# Altium PCB DUTBoard_NO_CAPS_2.PcbDoc (part 1 of 5)
Units mil, origin at the board's own origin, x right, y up, seen from the top; angles counter-clockwise.
Board outline 5475 x 5475 mil, 4 copper layers (Top Layer, Mid-Layer 1, Mid-Layer 2, Bottom Layer); 57 components, 471 nets, 1641 pads, 1025 vias.
Unrouted connection lines stored in the file: 1.
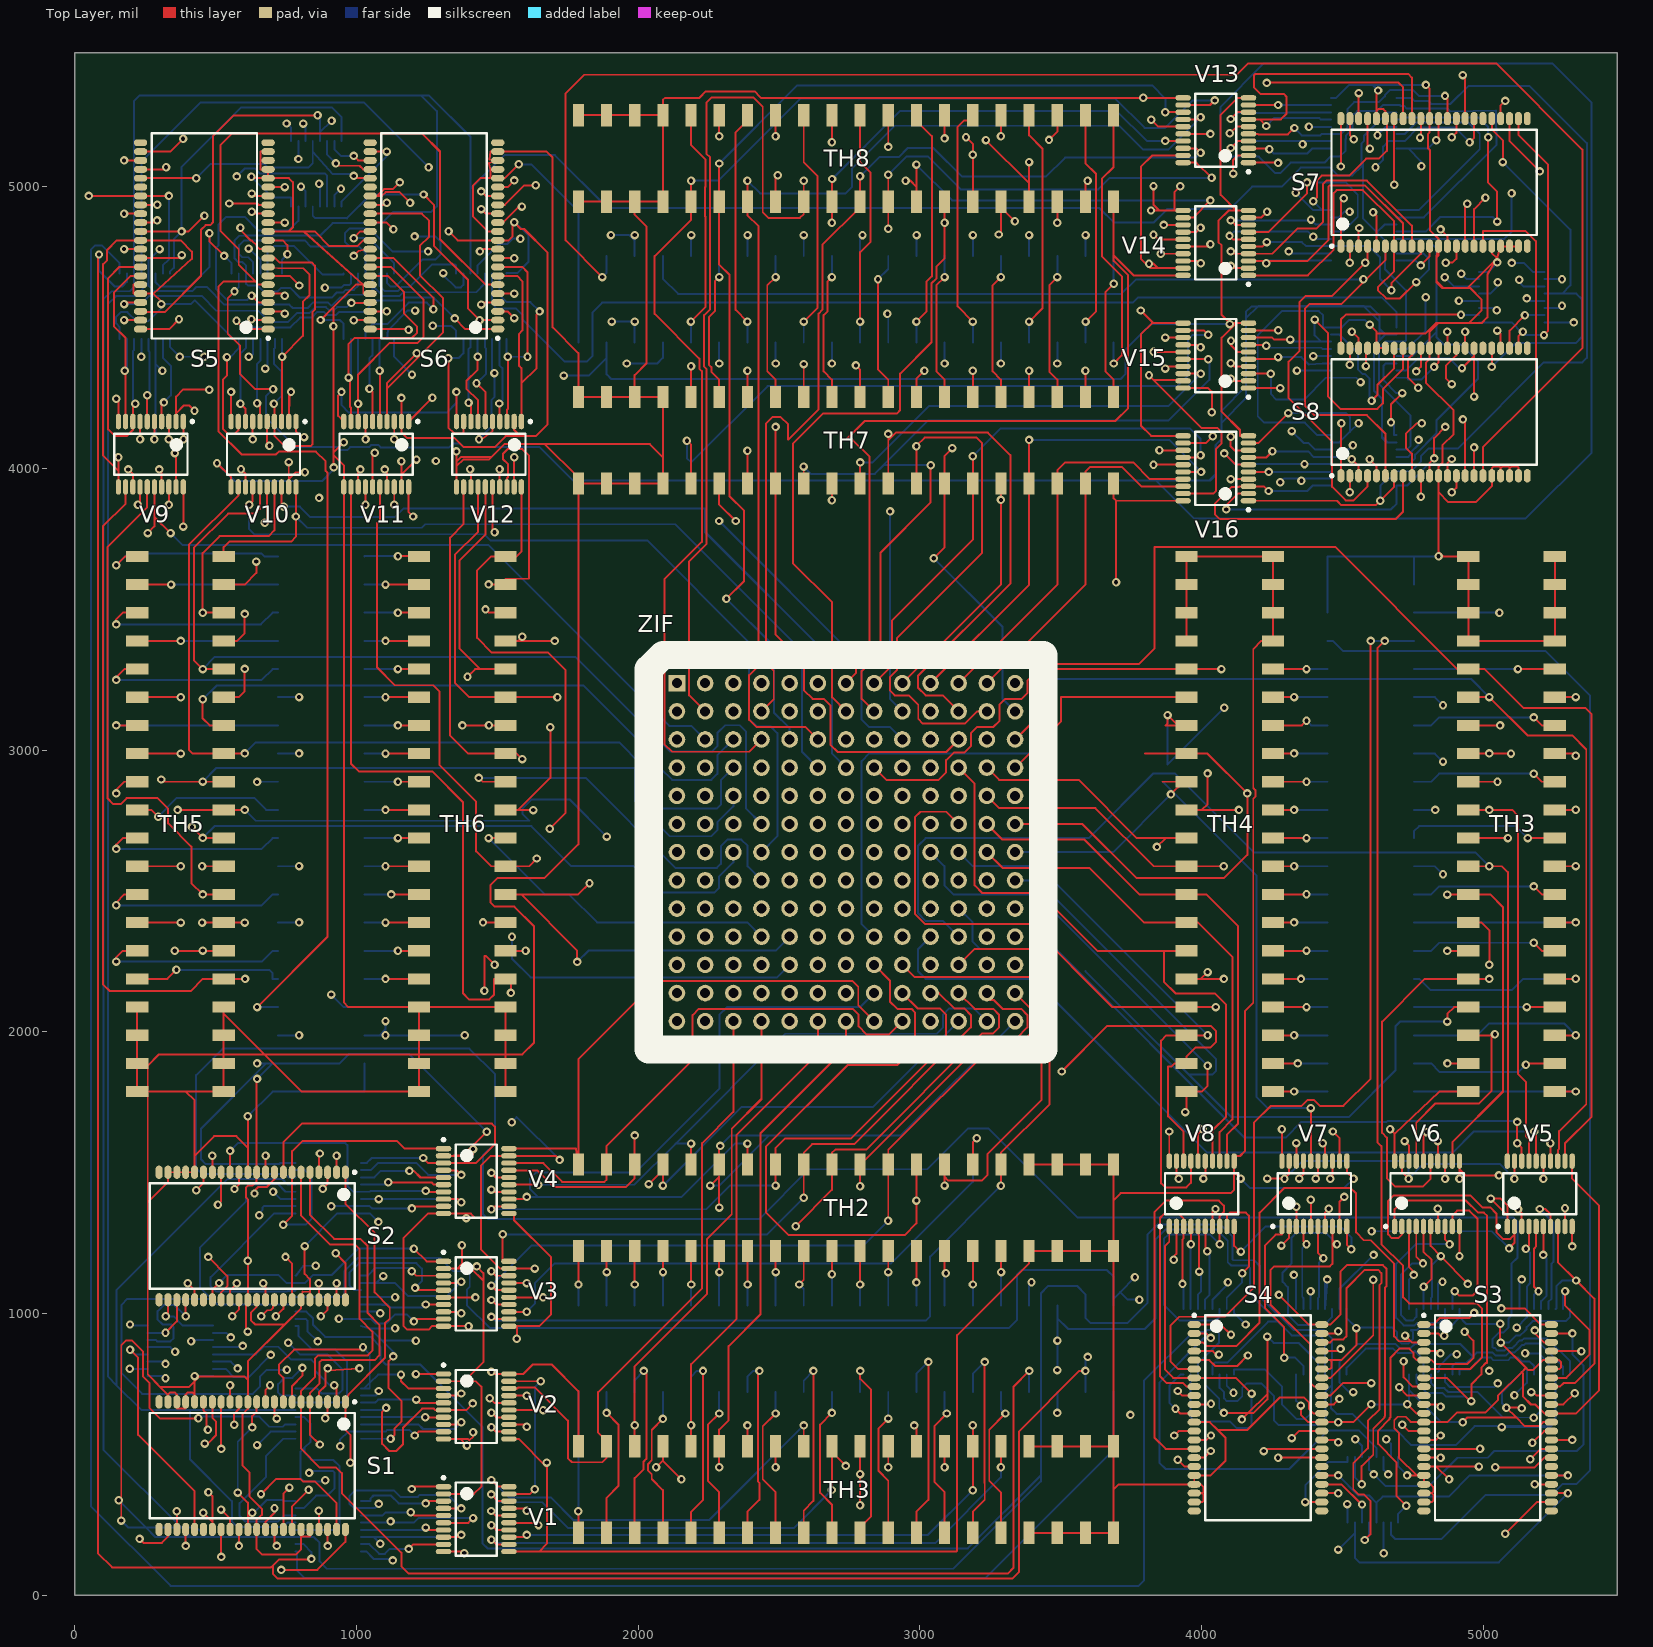
[diagram p0: Top Layer view]
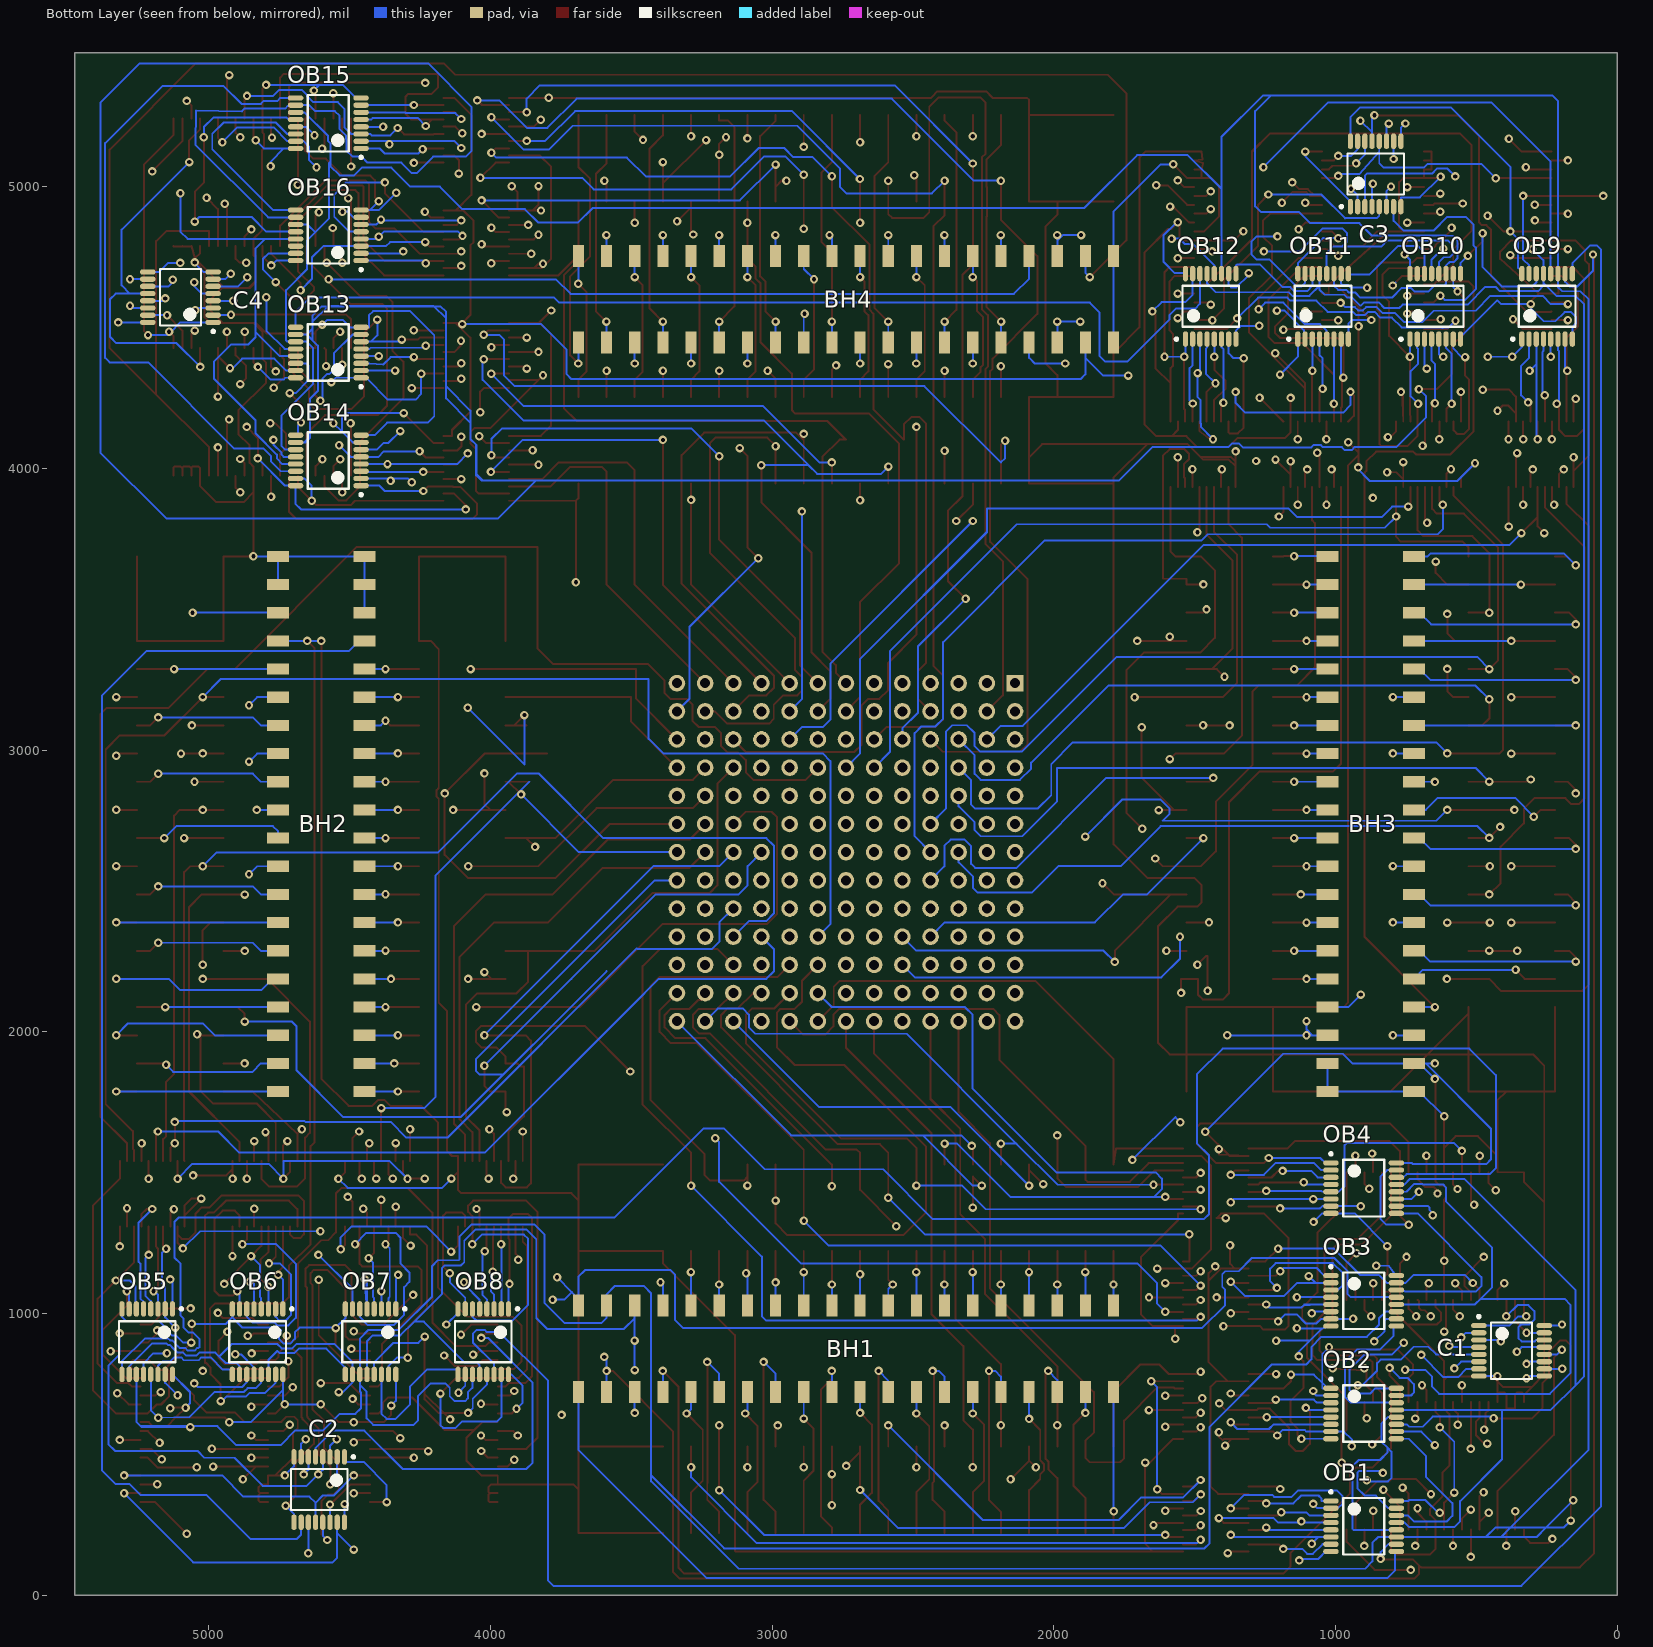
[diagram p1: Bottom Layer view, seen from below]
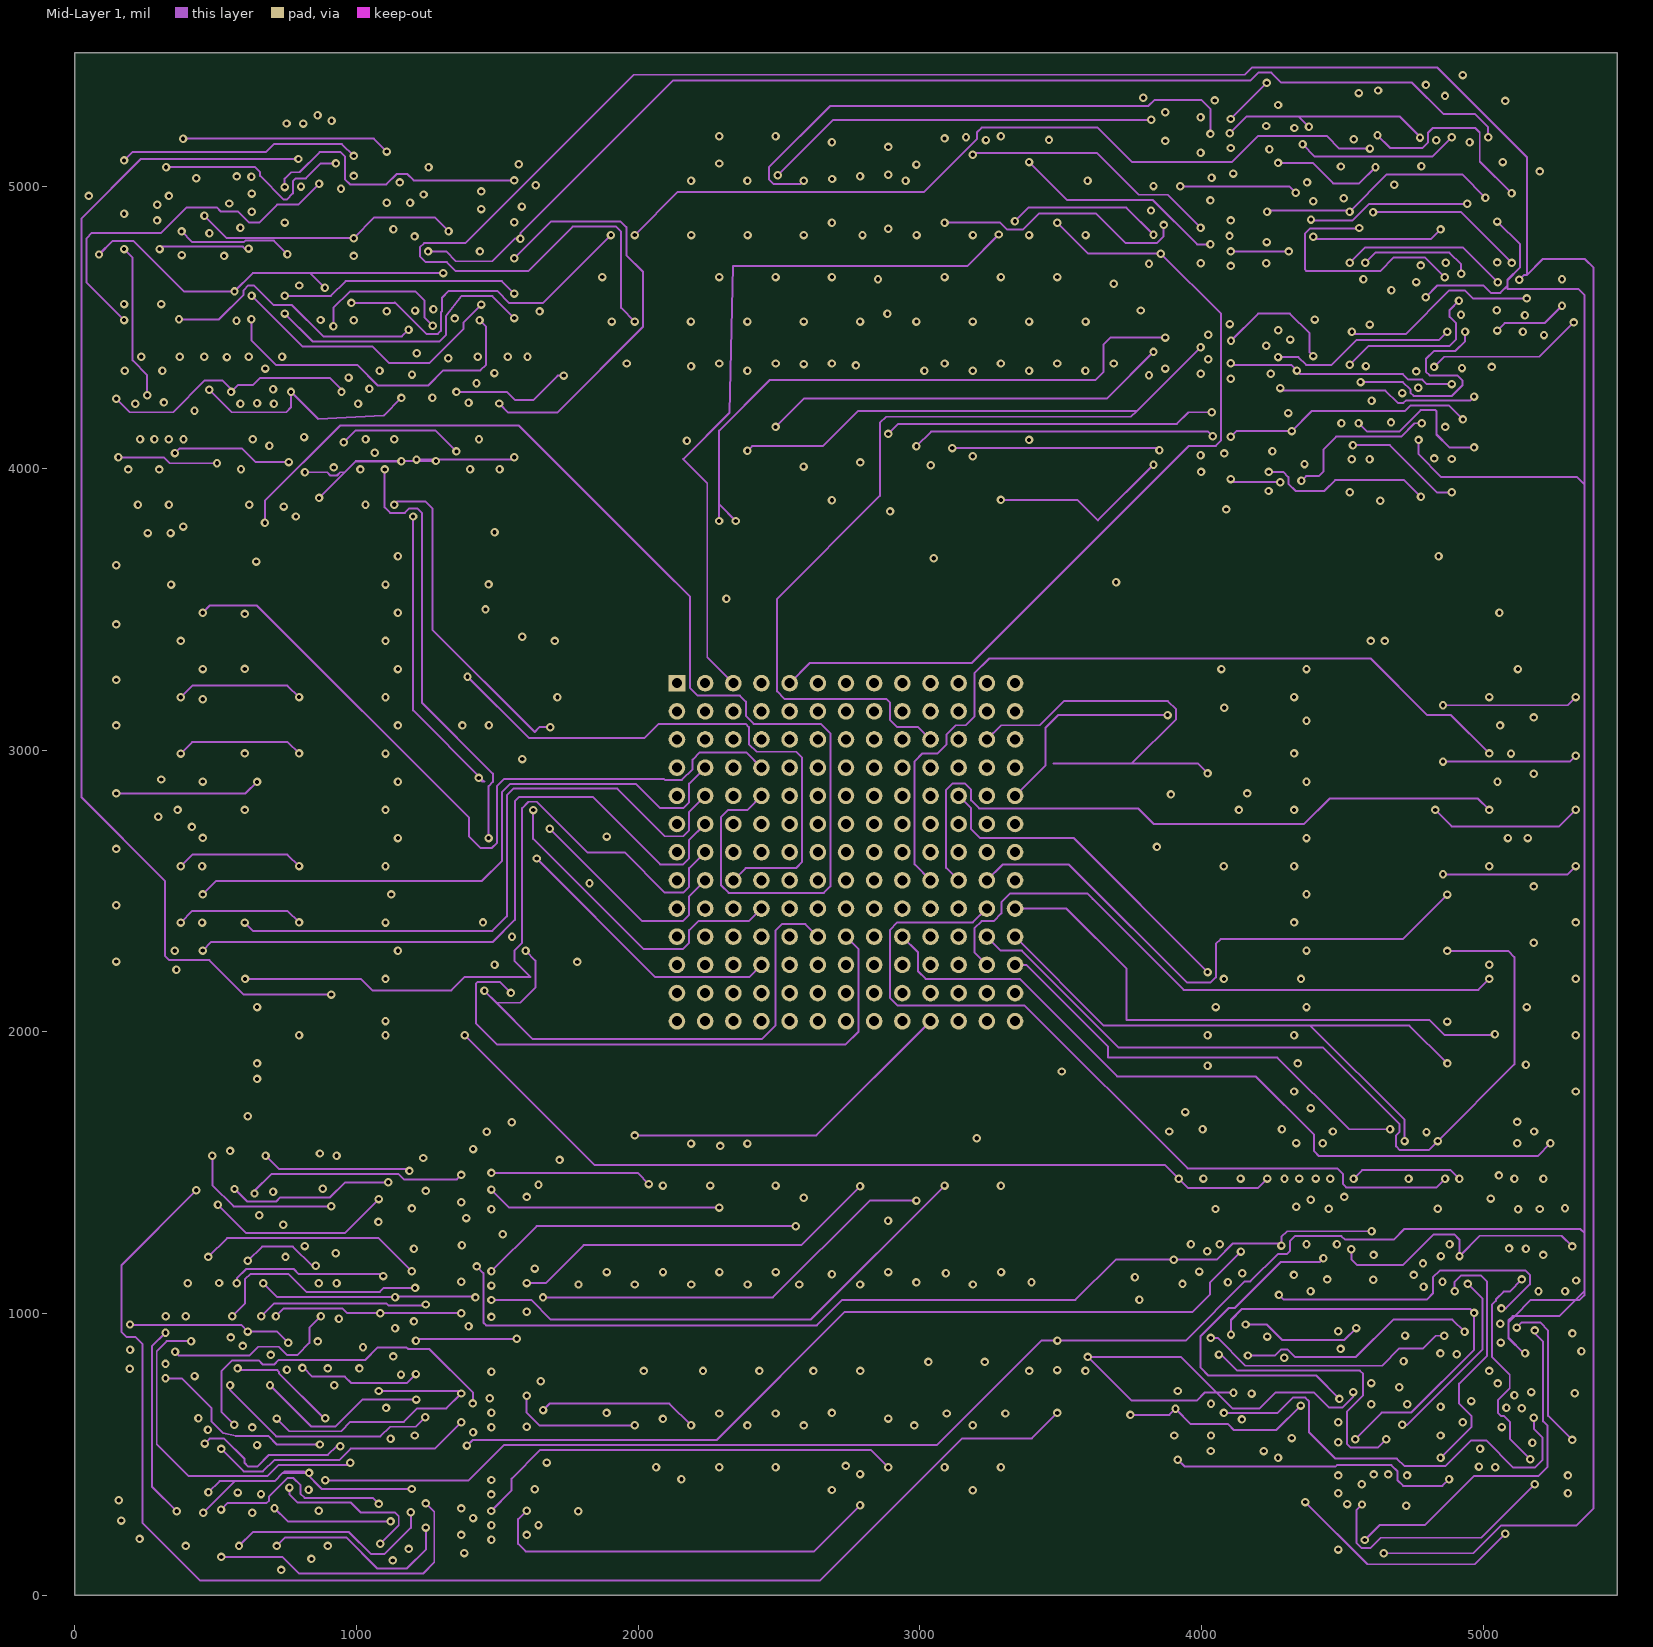
[diagram p2: Mid-Layer 1]
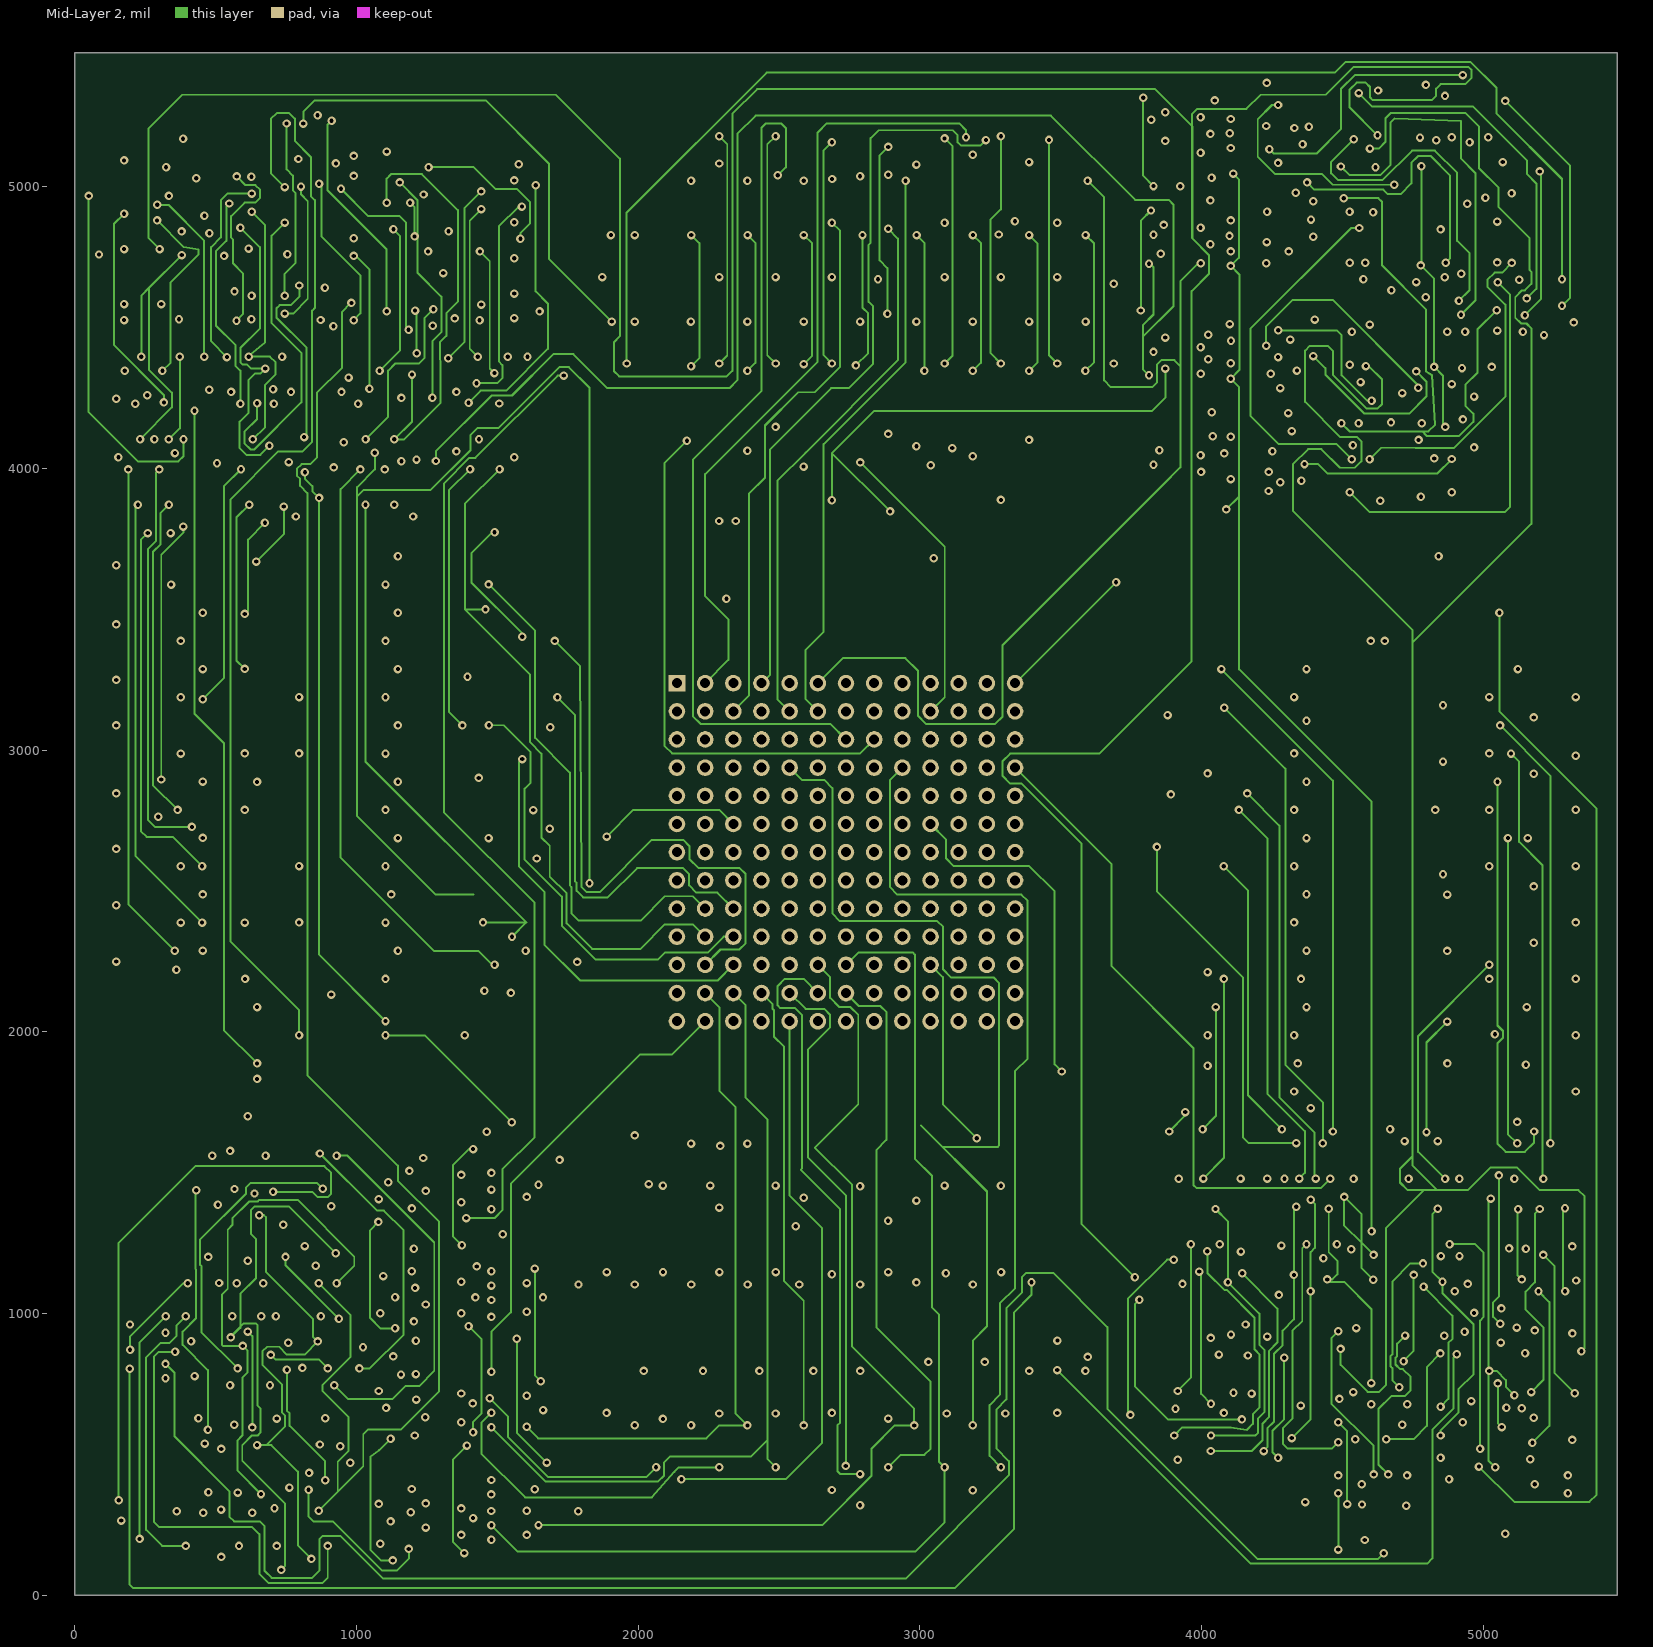
[diagram p3: Mid-Layer 2]
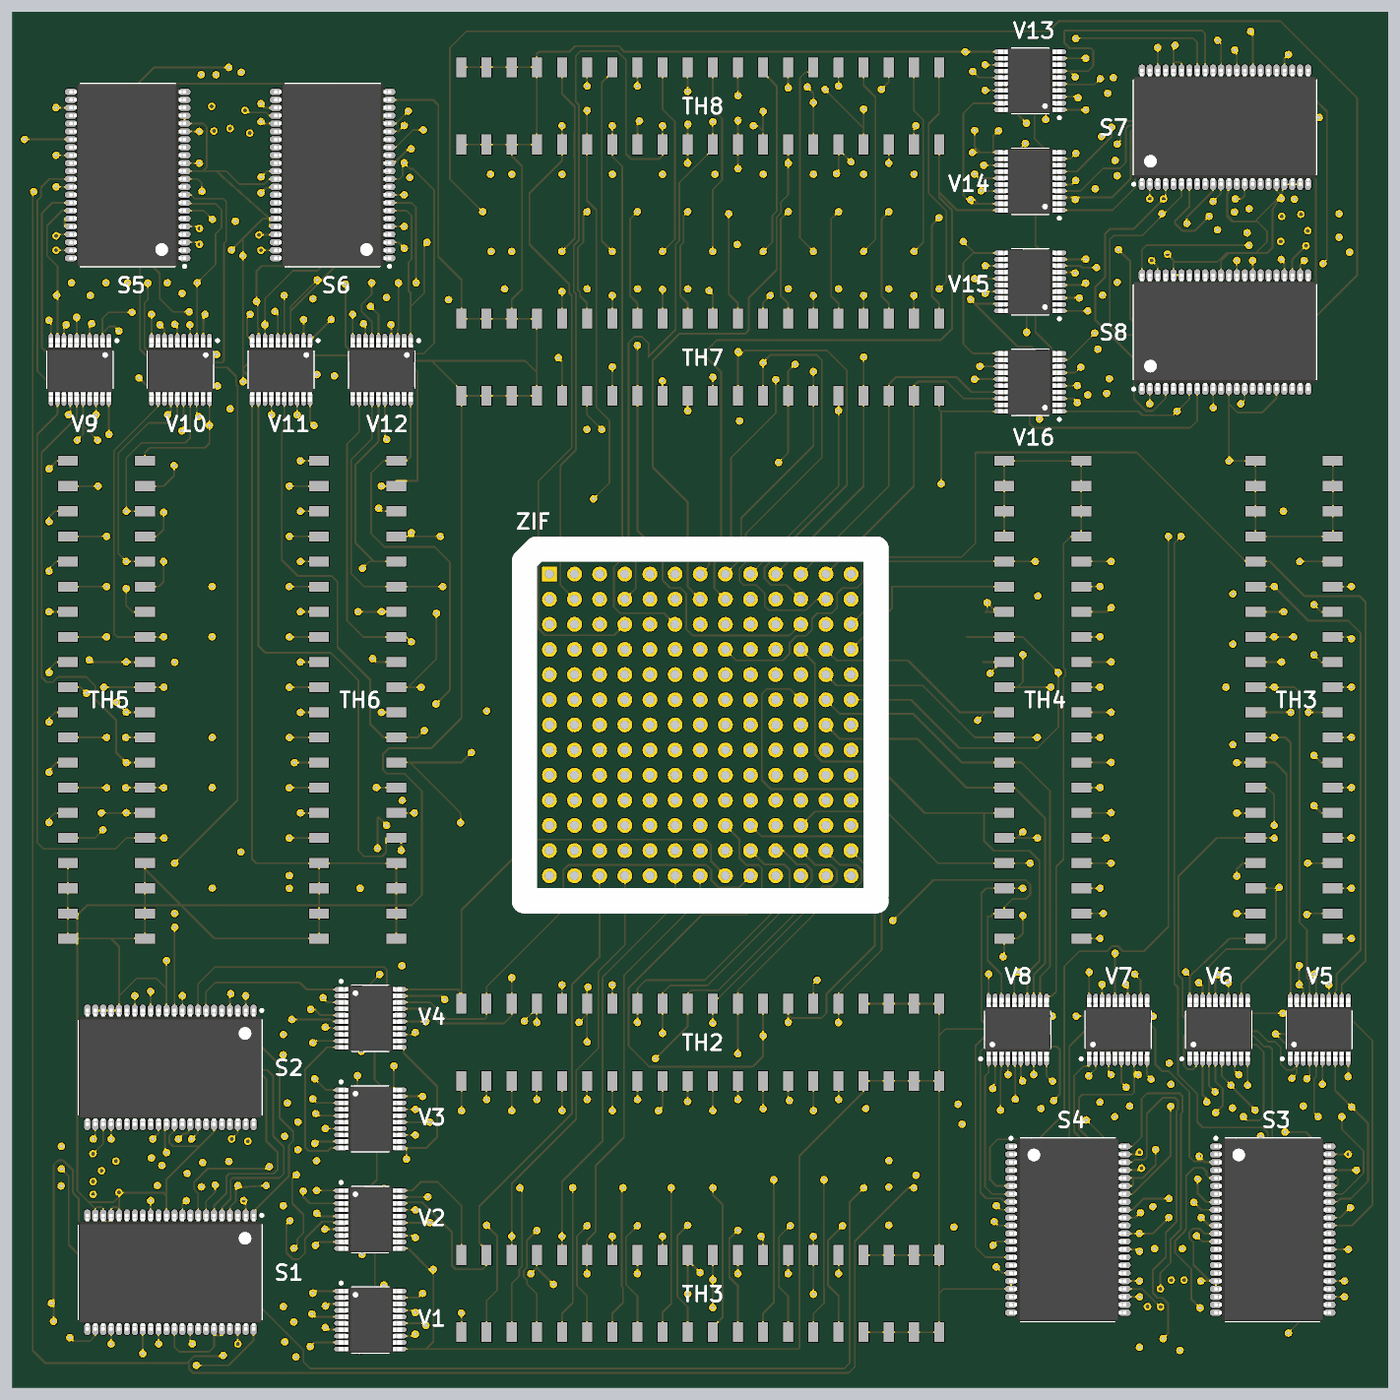
[diagram p8: 3D render of the assembled board from above, using the file's embedded part models]
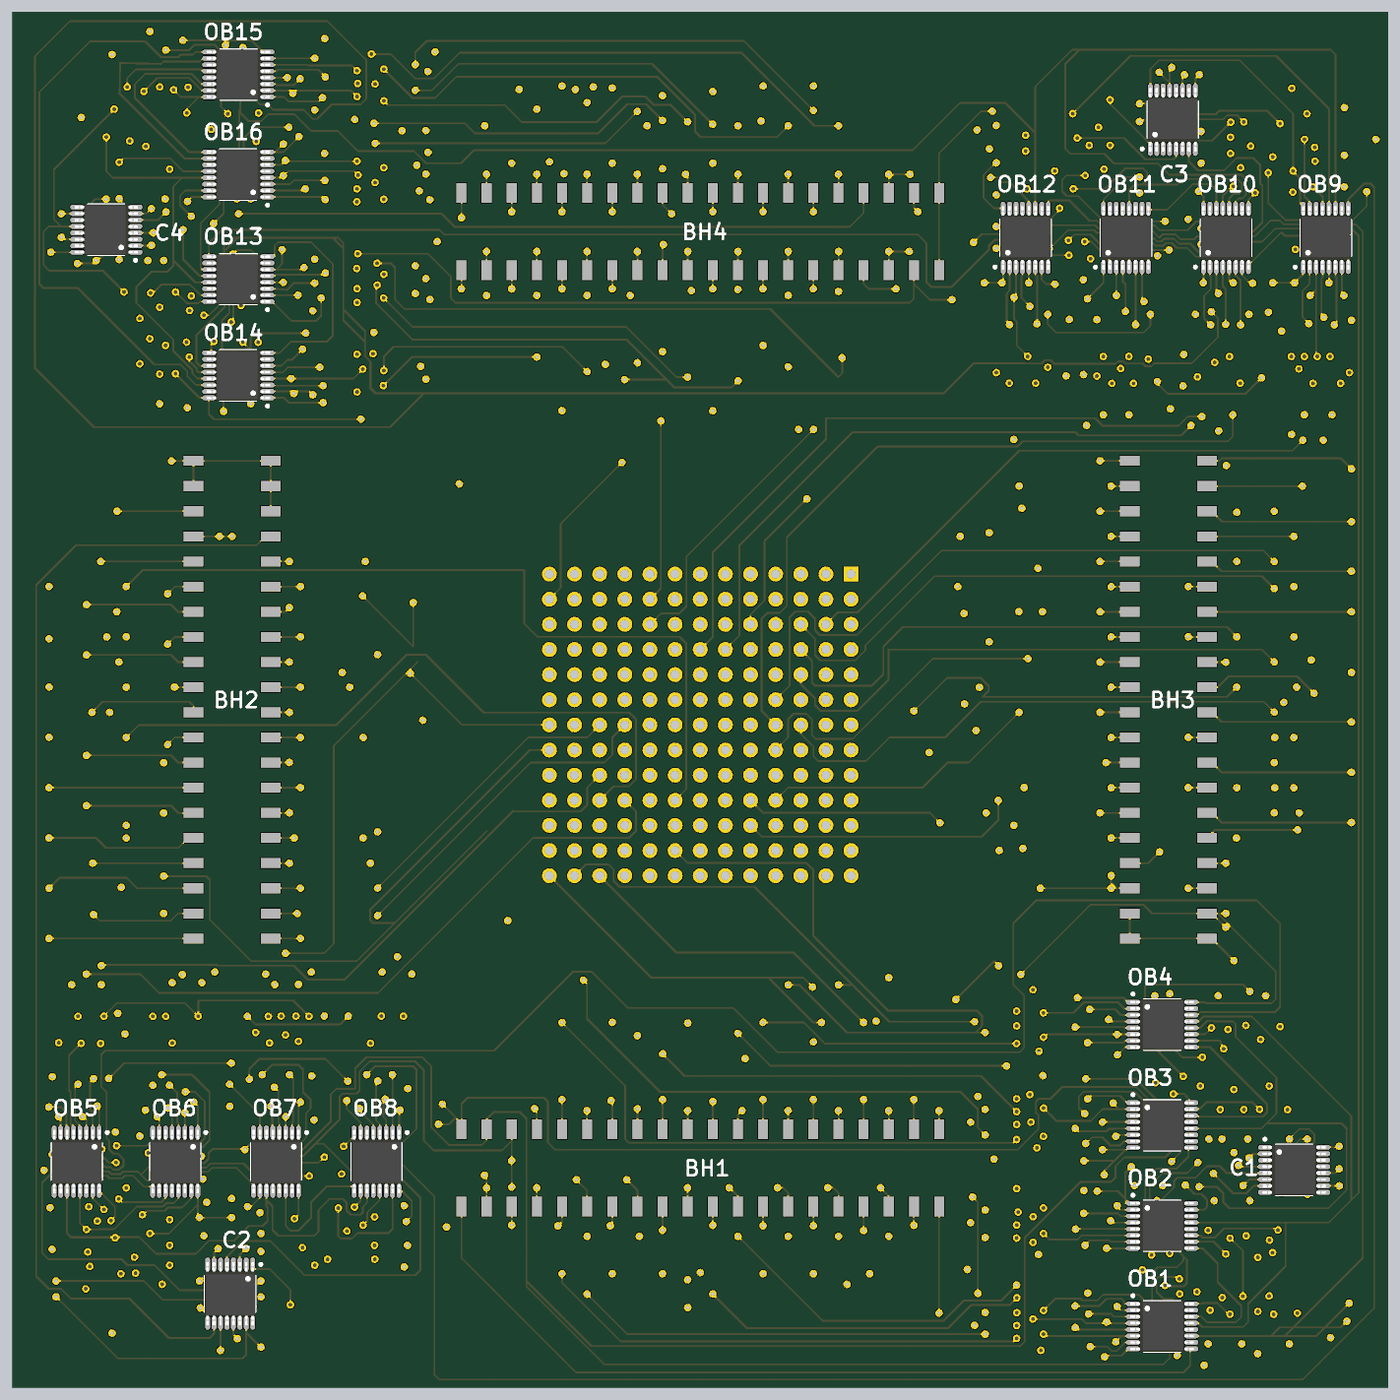
[diagram p9: 3D render of the assembled board from below, using the file's embedded part models]

## Layer stack, top to bottom
Top Solder: solder mask 0.4, Solder Resist, Dk 3.5
Top Layer: signal copper 1.4
Dielectric 1: dielectric 12.6, FR-4, Dk 4.8
Mid-Layer 1: signal copper 1.4
Dielectric2: dielectric 12.6, FR-4, Dk 4.8
Mid-Layer 2: signal copper 1.4
Dielectric3: dielectric 12.6, FR-4, Dk 4.8
Bottom Layer: signal copper 1.4
Bottom Solder: solder mask 0.4, Solder Resist, Dk 3.5

## Board outline
0,0 5475,0 5475,5475 0,5475

## Design rules (kind name [scope] priority, off if disabled: settings)
BoardOutlineClearance [All] p1: gap=20
Clearance [All] p1: gap=10 except(6: SMDPad-SMDPad)
HoleSize [All] p1: absolutevalues=TRUE maxlimit=50 minlimit=15 maxpercent=80.000 minpercent=20.000
MinimumAnnularRing [All] p1: minimumring=7
MinimumSolderMaskSliver [All] p1: minsoldermaskwidth=6
PolygonConnect [All] p1: connectstyle=Relief reliefconductorwidth=10 reliefentries=4 polygonreliefangle="90 Angle" airgapwidth=10
RoutingCorners [All] p1: cornerstyle=45-Degree minsetback=50 maxsetback=50
RoutingVias [All] p1: holewidth=15 width=30 viastyle="Through Hole" minholewidth=15 minwidth=30 maxholewidth=15 maxwidth=30
SolderMaskExpansion [All] p1: expansion=4
Width [All] p1: maxlimit=7 minlimit=7 preferedwidth=7
27 further rules are at their usual default settings.

## Classes and differential pairs
channel class TOP_HEADER_WRP: U_TOP_HEADER_WRP1 U_TOP_HEADER_WRP2 U_TOP_HEADER_WRP3 U_TOP_HEADER_WRP4 U_TOP_HEADER_WRP5 U_TOP_HEADER_WRP6 U_TOP_HEADER_WRP7 U_TOP_HEADER_WRP8
channel class COMBINED_HEADER_WRP: U_COMBINED_HEADER_WRP1 U_COMBINED_HEADER_WRP2 U_COMBINED_HEADER_WRP3 U_COMBINED_HEADER_WRP4
channel class BOTTOM_HEADER_WRP: U_BOTTOM_HEADER_WRP1 U_BOTTOM_HEADER_WRP2 U_BOTTOM_HEADER_WRP3 U_BOTTOM_HEADER_WRP4
net class INSIDE_B[111..0]: INSIDE_B0 INSIDE_B1 INSIDE_B2 INSIDE_B3 INSIDE_B4 INSIDE_B5 INSIDE_B6 INSIDE_B7 INSIDE_B8 INSIDE_B9 INSIDE_B10 INSIDE_B11 INSIDE_B12 INSIDE_B13 INSIDE_B14 INSIDE_B15 INSIDE_B16 INSIDE_B17 INSIDE_B18 INSIDE_B19 INSIDE_B20 INSIDE_B21 INSIDE_B22 INSIDE_B23 INSIDE_B24 INSIDE_B25 INSIDE_B26 INSIDE_B27 INSIDE_B28 INSIDE_B29 INSIDE_B30 INSIDE_B31 INSIDE_B32 INSIDE_B33 INSIDE_B34 INSIDE_B35 INSIDE_B36 INSIDE_B37 INSIDE_B38 INSIDE_B39 INSIDE_B40 INSIDE_B41 INSIDE_B42 INSIDE_B43 INSIDE_B44 INSIDE_B45 INSIDE_B46 INSIDE_B47 INSIDE_B48 INSIDE_B49 INSIDE_B50 INSIDE_B51 INSIDE_B52 INSIDE_B53 INSIDE_B54 INSIDE_B55 INSIDE_B56 INSIDE_B57 INSIDE_B58 INSIDE_B59 INSIDE_B60 INSIDE_B61 INSIDE_B62 INSIDE_B63 INSIDE_B64 INSIDE_B65 INSIDE_B66 INSIDE_B67 INSIDE_B68 INSIDE_B69 INSIDE_B70 INSIDE_B71 INSIDE_B72 INSIDE_B73 INSIDE_B74 INSIDE_B75 INSIDE_B76 INSIDE_B77 INSIDE_B78 INSIDE_B79 INSIDE_B80 INSIDE_B81 INSIDE_B82 INSIDE_B83 INSIDE_B84 INSIDE_B85 INSIDE_B86 INSIDE_B87 INSIDE_B88 INSIDE_B89 INSIDE_B90 INSIDE_B91 INSIDE_B92 INSIDE_B93 INSIDE_B94 INSIDE_B95 INSIDE_B96 INSIDE_B97 INSIDE_B98 INSIDE_B99 INSIDE_B100 INSIDE_B101 INSIDE_B102 INSIDE_B103 INSIDE_B104 INSIDE_B105 INSIDE_B106 INSIDE_B107 INSIDE_B108 INSIDE_B109 INSIDE_B110 INSIDE_B111 INSIDE_B112 INSIDE_B113 INSIDE_B114 INSIDE_B115 INSIDE_B116 INSIDE_B117 INSIDE_B118 INSIDE_B119 INSIDE_B120 INSIDE_B121 INSIDE_B122 INSIDE_B123 INSIDE_B124 INSIDE_B125 INSIDE_B126 INSIDE_B127
component class U_TOP_HEADER_WRP8: TH8
component class U_TOP_HEADER_WRP7: TH7
component class U_TOP_HEADER_WRP6: TH6
component class U_TOP_HEADER_WRP5: TH5
component class U_TOP_HEADER_WRP4: TH4
component class U_TOP_HEADER_WRP2: TH2
component class U_TOP_HEADER_WRP1: TH3
component class U_BOTTOM_HEADER_WRP4: BH4
component class U_BOTTOM_HEADER_WRP3: BH3
component class U_BOTTOM_HEADER_WRP2: BH2
component class U_BOTTOM_HEADER_WRP1: BH1
channel class VT_WRP: U_VT_WRP1 U_VT_WRP2 U_VT_WRP3 U_VT_WRP4 U_VT_WRP5 U_VT_WRP6 U_VT_WRP7 U_VT_WRP8 U_VT_WRP9 U_VT_WRP10 U_VT_WRP11 U_VT_WRP12 U_VT_WRP13 U_VT_WRP14 U_VT_WRP15 U_VT_WRP16
channel class SRAM_WRP: U_SRAM_WRP1 U_SRAM_WRP2 U_SRAM_WRP3 U_SRAM_WRP4 U_SRAM_WRP5 U_SRAM_WRP6 U_SRAM_WRP7 U_SRAM_WRP8
channel class OB_WRP: U_OB_WRP1 U_OB_WRP2 U_OB_WRP3 U_OB_WRP4 U_OB_WRP5 U_OB_WRP6 U_OB_WRP7 U_OB_WRP8 U_OB_WRP9 U_OB_WRP10 U_OB_WRP11 U_OB_WRP12 U_OB_WRP13 U_OB_WRP14 U_OB_WRP15 U_OB_WRP16
channel class COUNTER_WRP: U_COUNTER_WRP1 U_COUNTER_WRP2 U_COUNTER_WRP3 U_COUNTER_WRP4
component class U_VT_WRP16: V14
component class U_VT_WRP15: V13
component class U_VT_WRP12: V12
component class U_VT_WRP11: V11
component class U_VT_WRP10: V10
component class U_VT_WRP9: V9
component class U_VT_WRP8: V8
component class U_VT_WRP7: V7
component class U_VT_WRP6: V6
component class U_VT_WRP5: V5
component class U_VT_WRP4: V4
component class U_VT_WRP3: V3
component class U_VT_WRP2: V2
component class U_VT_WRP1: V1
component class U_SRAM_WRP8: S7
component class U_SRAM_WRP7: S8
component class U_SRAM_WRP6: S6
component class U_SRAM_WRP5: S5
component class U_SRAM_WRP4: S4
component class U_SRAM_WRP3: S3
component class U_SRAM_WRP2: S2
component class U_OB_WRP16: OB16
component class U_OB_WRP15: OB15
component class U_OB_WRP14: OB14
component class U_OB_WRP13: OB13
component class U_OB_WRP12: OB12
component class U_OB_WRP11: OB11
component class U_OB_WRP10: OB10
component class U_OB_WRP9: OB9
component class U_OB_WRP8: OB8
component class U_OB_WRP7: OB7
component class U_OB_WRP5: OB5
component class U_OB_WRP4: OB4
component class U_OB_WRP3: OB3
component class U_OB_WRP2: OB2
component class U_COUNTER_WRP4: C4
component class U_COUNTER_WRP3: C3
component class U_COUNTER_WRP2: C2
component class U_COUNTER_WRP1: C1

## Components (designator, comment, footprint, x,y, rotation, side; value= is the part's Value field where it differs from the comment)
BH1 "ADAFRUIT_HEADER" FEMALE_HEADER_SMD 2737.5,875 r0 bottom (schematic designator ETH1)
BH2 "ADAFRUIT_HEADER" FEMALE_HEADER_SMD 4600,2737.5 r90 bottom (schematic designator ETH1)
BH3 "ADAFRUIT_HEADER" FEMALE_HEADER_SMD 875,2737.5 r270 bottom (schematic designator ETH1)
BH4 "ADAFRUIT_HEADER" FEMALE_HEADER_SMD 2737.5,4600 r180 bottom (schematic designator ETH1)
C1 "74VHC4040FT(BJ)" COUNTER_TSSOP16 375,867.5 r180 bottom (schematic designator COUNTER1)
C2 "74VHC4040FT(BJ)" COUNTER_TSSOP16 4607.5,375 r270 bottom (schematic designator COUNTER1)
C3 "74VHC4040FT(BJ)" COUNTER_TSSOP16 857.5,5045 r90 bottom (schematic designator COUNTER1)
C4 "74VHC4040FT(BJ)" COUNTER_TSSOP16 5100,4607.5 r0 bottom (schematic designator COUNTER1)
OB1 "74HC597PW,118" OB_TSSOP16 900,245 r180 bottom
OB2 "74HC597PW,118" OB_TSSOP16 900,645 r180 bottom (schematic designator OB1)
OB3 "74HC597PW,118" OB_TSSOP16 900,1045 r180 bottom (schematic designator OB1)
OB4 "74HC597PW,118" OB_TSSOP16 900,1445 r180 bottom (schematic designator OB1)
OB5 "74HC597PW,118" OB_TSSOP16 5218,900 r270 bottom (schematic designator OB1)
OB6 "74HC597PW,118" OB_TSSOP16 4826,900 r270 bottom (schematic designator OB1)
OB7 "74HC597PW,118" OB_TSSOP16 4425,900 r270 bottom (schematic designator OB1)
OB8 "74HC597PW,118" OB_TSSOP16 4025,900 r270 bottom (schematic designator OB1)
OB9 "74HC597PW,118" OB_TSSOP16 249,4575 r90 bottom (schematic designator OB1)
OB10 "74HC597PW,118" OB_TSSOP16 646,4575 r90 bottom (schematic designator OB1)
OB11 "74HC597PW,118" OB_TSSOP16 1044,4575 r90 bottom (schematic designator OB1)
OB12 "74HC597PW,118" OB_TSSOP16 1443,4575 r90 bottom (schematic designator OB1)
OB13 "74HC597PW,118" OB_TSSOP16 4575,4411 r0 bottom (schematic designator OB1)
OB14 "74HC597PW,118" OB_TSSOP16 4575,4028 r0 bottom (schematic designator OB1)
OB15 "74HC597PW,118" OB_TSSOP16 4575,5225 r0 bottom (schematic designator OB1)
OB16 "74HC597PW,118" OB_TSSOP16 4575,4827 r0 bottom (schematic designator OB1)
S1 "71V016SA10PHG" SRAM_TSSOP44-II 630,460 r270 top (schematic designator SRAM1)
S2 "71V016SA10PHG" SRAM_TSSOP44-II 630,1275 r270 top (schematic designator SRAM1)
S3 "71V016SA10PHG" SRAM_TSSOP44-II 5015,630 r0 top (schematic designator SRAM1)
S4 "71V016SA10PHG" SRAM_TSSOP44-II 4200,630 r0 top (schematic designator SRAM1)
S5 "71V016SA10PHG" SRAM_TSSOP44-II 460,4825 r180 top (schematic designator SRAM1)
S6 "71V016SA10PHG" SRAM_TSSOP44-II 1275,4825 r180 top (schematic designator SRAM1)
S7 "71V016SA10PHG" SRAM_TSSOP44-II 4825,5015 r90 top (schematic designator SRAM1)
S8 "71V016SA10PHG" SRAM_TSSOP44-II 4825,4200 r90 top (schematic designator SRAM1)
TH2 "ADAFRUIT_HEADER" FEMALE_HEADER_SMD 2737.5,1375 r0 top (schematic designator ETH1)
TH3 "ADAFRUIT_HEADER" FEMALE_HEADER_SMD 5100,2737.5 r90 top (schematic designator ETH1)
TH3 "ADAFRUIT_HEADER" FEMALE_HEADER_SMD 2737.5,375 r0 top (schematic designator ETH1)
TH4 "ADAFRUIT_HEADER" FEMALE_HEADER_SMD 4100,2737.5 r90 top (schematic designator ETH1)
TH5 "ADAFRUIT_HEADER" FEMALE_HEADER_SMD 375,2737.5 r270 top (schematic designator ETH1)
TH6 "ADAFRUIT_HEADER" FEMALE_HEADER_SMD 1375,2737.5 r270 top (schematic designator ETH1)
TH7 "ADAFRUIT_HEADER" FEMALE_HEADER_SMD 2737.5,4100 r180 top (schematic designator ETH1)
TH8 "ADAFRUIT_HEADER" FEMALE_HEADER_SMD 2737.5,5100 r180 top (schematic designator ETH1)
V1 "MAX3012EUP+" VT_TSSOP20 1425,270 r0 top (schematic designator VT1)
V2 "MAX3012EUP+" VT_TSSOP20 1425,670 r0 top (schematic designator VT1)
V3 "MAX3012EUP+" VT_TSSOP20 1425,1070 r0 top (schematic designator VT1)
V4 "MAX3012EUP+" VT_TSSOP20 1425,1470 r0 top (schematic designator VT1)
V5 "MAX3012EUP+" VT_TSSOP20 5200,1425 r90 top (schematic designator VT1)
V6 "MAX3012EUP+" VT_TSSOP20 4800,1425 r90 top (schematic designator VT1)
V7 "MAX3012EUP+" VT_TSSOP20 4400,1425 r90 top (schematic designator VT1)
V8 "MAX3012EUP+" VT_TSSOP20 4000,1425 r90 top (schematic designator VT1)
V9 "MAX3012EUP+" VT_TSSOP20 270,4050 r270 top (schematic designator VT1)
V10 "MAX3012EUP+" VT_TSSOP20 670,4050 r270 top (schematic designator VT1)
V11 "MAX3012EUP+" VT_TSSOP20 1070,4050 r270 top (schematic designator VT1)
V12 "MAX3012EUP+" VT_TSSOP20 1470,4050 r270 top (schematic designator VT1)
V13 "MAX3012EUP+" VT_TSSOP20 4050,5200 r180 top (schematic designator VT1)
V14 "MAX3012EUP+" VT_TSSOP20 4050,4800 r180 top (schematic designator VT1)
V15 "MAX3012EUP+" VT_TSSOP20 4050,4400 r180 top (schematic designator VT1)
V16 "MAX3012EUP+" VT_TSSOP20 4050,4000 r180 top (schematic designator VT1)
ZIF "200-6313-9UN-1900" ZIF_13x13 2737.5,2637.5 r0 top (schematic designator ZIF1)

## Footprints (in the part's own frame and the unit in brackets; to place one, negate y for a bottom-side part, rotate by r counter-clockwise, add the part's x,y. Pads: shape width x height; smd on the part's side, far side on the other; paste and mask are expansions set on the pad)
COUNTER_TSSOP16 [mm] "TSOP, 16-Leads, Body 5.00x4.40mm, Pitch 0.65mm, IPC Medium Density"
  oval 1.4x0.475 smd: ADDR0(2.95,-2.275) ADDR1(-2.95,-1.625) ADDR2(-2.95,-0.975) ADDR3(-2.95,-0.325) ADDR4(-2.95,0.975) ADDR5(-2.95,1.625) ADDR6(-2.95,0.325) ADDR7(2.95,0.325) ADDR8(2.95,-0.325) ADDR9(2.95,0.975) ADDR10(2.95,1.625) ADDR11(-2.95,2.275) CLR(2.95,-0.975) GND(-2.95,-2.275) VCC(2.95,2.275) ~CLK(2.95,-1.625)
  silkscreen extent -3.08,-2.55 1.85,3.21, body extent -3.2,-2.55 3.2,2.55, height 1.2
FEMALE_HEADER_SMD [mm]
  rect 1x2 smd: 1(-24.13,-3.9) 2(-21.59,-3.9) 3(-19.05,-3.9) 4(-16.51,-3.9) 5(-13.97,-3.9) 6(-11.43,-3.9) 7(-8.89,-3.9) 8(-6.35,-3.9) 9(-3.81,-3.9) 10(-1.27,-3.9) 11(1.27,-3.9) 12(3.81,-3.9) 13(6.35,-3.9) 14(8.89,-3.9) 15(11.43,-3.9) 16(13.97,-3.9) 17(16.51,-3.9) 18(19.05,-3.9) 19(21.59,-3.9) 20(24.13,-3.9) 21(24.13,3.9) 22(21.59,3.9) 23(19.05,3.9) 24(16.51,3.9) 25(13.97,3.9) 26(11.43,3.9) 27(8.89,3.9) 28(6.35,3.9) 29(3.81,3.9) 30(1.27,3.9) 31(-1.27,3.9) 32(-3.81,3.9) 33(-6.35,3.9) 34(-8.89,3.9) 35(-11.43,3.9) 36(-13.97,3.9) 37(-16.51,3.9) 38(-19.05,3.9) 39(-21.59,3.9) 40(-24.13,3.9)
OB_TSSOP16 [mm] "TSOP, 16-Leads, Body 5.00x4.40mm, Pitch 0.65mm, IPC Medium Density"
  oval 1.4x0.475 smd: D0(2.95,1.625) D1(-2.95,2.275) D2(-2.95,1.625) D3(-2.95,0.975) D4(-2.95,0.325) D5(-2.95,-0.325) D6(-2.95,-0.975) D7(-2.95,-1.625) DS(2.95,0.975) GND(-2.95,-2.275) Q(2.95,-2.275) SHCP(2.95,-0.975) STCP(2.95,-0.325) VCC(2.95,2.275) ~MR(2.95,-1.625) ~PL(2.95,0.325)
  silkscreen extent -3.08,-2.55 1.85,3.21, body extent -3.2,-2.55 3.2,2.55, height 1.1
SRAM_TSSOP44-II [mm] "TSOP, 44-Leads, Body 18.41x10.16mm, Pitch 0.80mm, IPC Medium Density"
  oval 1.2x0.625 smd: ADDR0(-5.75,5.2) ADDR1(-5.75,6) ADDR2(-5.75,6.8) ADDR3(-5.75,7.6) ADDR4(-5.75,8.4) ADDR5(5.75,8.4) ADDR6(5.75,7.6) ADDR7(5.75,6.8) ADDR8(5.75,-5.2) ADDR9(5.75,-6) ADDR10(5.75,-6.8) ADDR11(5.75,-7.6) ADDR12(-5.75,-7.6) ADDR13(-5.75,-6.8) ADDR14(-5.75,-6) ADDR15(-5.75,-5.2) DATA0(-5.75,3.6) DATA1(-5.75,2.8) DATA2(-5.75,2) DATA3(-5.75,1.2) DATA4(-5.75,-1.2) DATA5(-5.75,-2) DATA6(-5.75,-2.8) DATA7(-5.75,-3.6) DATA8(5.75,-3.6) DATA9(5.75,-2.8) DATA10(5.75,-2) DATA11(5.75,-1.2) DATA12(5.75,1.2) DATA13(5.75,2) DATA14(5.75,2.8) DATA15(5.75,3.6) NC1(5.75,-8.4) NC2(5.75,-4.4) NC3(-5.75,-8.4) VDD(-5.75,0.4) VDD(5.75,-0.4) VSS(-5.75,-0.4) VSS(5.75,0.4) ~BHE(5.75,5.2) ~BLE(5.75,4.4) ~CS(-5.75,4.4) ~OE(5.75,6) ~WE(-5.75,-4.4)
  silkscreen extent -5.87,-9.25 4.75,9.35, body extent -5.92,-9.25 5.92,9.25, height 1.19
VT_TSSOP20 [mm] "TSOP, 20-Leads, Body 6.50x4.40mm, Pitch 0.65mm, IPC Medium Density"
  oval 1.4x0.475 smd: EN(-2.95,-2.925) GND(2.95,-2.925) IVCC0(2.95,2.925) IVCC1(2.95,1.625) IVCC2(2.95,0.975) IVCC3(2.95,0.325) IVCC4(2.95,-0.325) IVCC5(2.95,-0.975) IVCC6(2.95,-1.625) IVCC7(2.95,-2.275) OVL0(-2.95,2.925) OVL1(-2.95,1.625) OVL2(-2.95,0.975) OVL3(-2.95,0.325) OVL4(-2.95,-0.325) OVL5(-2.95,-0.975) OVL6(-2.95,-1.625) OVL7(-2.95,-2.275) VCC(2.95,2.275) VL(-2.95,2.275)
  silkscreen extent -3.07,-3.3 1.85,3.86, body extent -3.2,-3.3 3.2,3.3, height 1.1
ZIF_13x13 [mm]
  round 1.5 hole 0.9: 1(0,15.24) 2(-2.54,15.24) 3(-5.08,15.24) 4(-7.62,15.24) 5(-10.16,15.24) 6(-12.7,15.24) 7(0,12.7) 8(-2.54,12.7) 9(-5.08,12.7) 10(-7.62,12.7) 11(-10.16,12.7) 12(-12.7,12.7) 13(0,10.16) 14(-2.54,10.16) 15(-5.08,10.16) 16(-7.62,10.16) 17(15.24,15.24) 18(12.7,15.24) 19(10.16,15.24) 20(7.62,15.24) 21(5.08,15.24) 22(2.54,15.24) 23(15.24,12.7) 24(12.7,12.7) 25(10.16,12.7) 26(7.62,12.7) 27(5.08,12.7) 28(2.54,12.7) 29(10.16,10.16) 30(7.62,10.16) 31(5.08,10.16) 32(2.54,10.16) 33(-12.7,-2.54) 34(-12.7,-5.08) 35(-12.7,-7.62) 36(-12.7,-10.16) 37(-10.16,-2.54) 38(-10.16,-5.08) 39(-10.16,-7.62) 40(-10.16,-10.16) 41(-7.62,-2.54) 42(-7.62,-5.08) 43(-7.62,-7.62) 44(-7.62,-10.16) 45(-5.08,-7.62) 46(-5.08,-10.16) 47(-2.54,-7.62) 48(0,-7.62) 49(-2.54,7.62) 50(0,7.62) 51(-7.62,7.62) 52(-7.62,5.08) 53(-7.62,2.54) 54(-7.62,0) 55(-10.16,10.16) 56(-10.16,7.62) 57(-10.16,5.08) 58(-10.16,2.54) 59(-10.16,0) 60(-12.7,10.16) 61(-12.7,7.62) 62(-12.7,5.08) 63(-12.7,2.54) 64(-12.7,0) 65(7.62,0) 66(7.62,2.54) 67(10.16,0) 68(10.16,2.54) 69(10.16,5.08) 70(10.16,7.62) 71(12.7,0) 72(12.7,2.54) 73(12.7,5.08) 74(12.7,7.62) 75(12.7,10.16) 76(15.24,0) 77(15.24,2.54) 78(15.24,5.08) 79(15.24,7.62) 80(15.24,10.16) 81(15.24,-10.16) 82(15.24,-7.62) 83(15.24,-5.08) 84(15.24,-2.54) 85(12.7,-10.16) 86(12.7,-7.62) 87(12.7,-5.08) 88(12.7,-2.54) 89(10.16,-7.62) 90(10.16,-5.08) 91(10.16,-2.54) 92(7.62,-7.62) 93(7.62,-2.54) 94(5.08,-7.62) 95(2.54,-7.62) 96(2.54,7.62) 97(2.54,-15.24) 98(5.08,-15.24) 99(7.62,-15.24) 100(10.16,-15.24) 101(12.7,-15.24) 102(15.24,-15.24) 103(2.54,-12.7) 104(5.08,-12.7) 105(7.62,-12.7) 106(10.16,-12.7) 107(12.7,-12.7) 108(15.24,-12.7) 109(2.54,-10.16) 110(5.08,-10.16) 111(7.62,-10.16) 112(10.16,-10.16) 113(-12.7,-15.24) 114(-10.16,-15.24) 115(-7.62,-15.24) 116(-5.08,-15.24) 117(-2.54,-15.24) 118(0,-15.24) 119(-12.7,-12.7) 120(-10.16,-12.7) 121(-7.62,-12.7) 122(-5.08,-12.7) 123(-2.54,-12.7) 124(0,-12.7) 125(-2.54,-10.16) 126(0,-10.16) 127(-5.08,7.62) 128(5.08,7.62) 129(7.62,7.62) 130(-5.08,5.08) 131(-2.54,5.08) 132(0,5.08) 133(2.54,5.08) 134(5.08,5.08) 135(7.62,5.08) 136(-5.08,2.54) 137(-2.54,2.54) 138(0,2.54) 139(2.54,2.54) 140(5.08,2.54) 141(-5.08,0) 142(-2.54,0) 143(0,0) 144(2.54,0) 145(5.08,0) 146(-5.08,-2.54) 147(-2.54,-2.54) 148(0,-2.54) 149(2.54,-2.54) 150(5.08,-2.54) 151(-5.08,-5.08) 152(-2.54,-5.08) 153(0,-5.08) 154(2.54,-5.08) 155(5.08,-5.08) 156(7.62,-5.08) 157(-15.24,-15.24) 158(-15.24,-12.7) 159(-15.24,-10.16) 160(-15.24,-7.62) 161(-15.24,-5.08) 162(-15.24,-2.54) 163(-15.24,0) 164(-15.24,2.54) 165(-15.24,5.08) 166(-15.24,7.62) 167(-15.24,10.16) 168(-15.24,12.7)
  rect 1.5x1.5 hole 0.9: 169(-15.24,15.24)
  silkscreen extent -17.78,-17.78 17.78,17.78

## Part data
BH1 BH2 BH3 BH4 TH2 TH3 TH3 TH4 TH5 TH6 TH7 TH8: "Extra tall female header (SMD)"
C1 C2 C3 C4: "IC COUNTER BIN 12STAGE 16-TSSOP"
OB1 OB2 OB3 OB4 OB5 OB6 OB7 OB8 OB9 OB10 OB11 OB12 OB13 OB14 OB15 OB16: "IC 8BIT SHIFT REGISTER 16TSSOP"
S1 S2 S3 S4 S5 S6 S7 S8: "IC SRAM 1MBIT 10NS 44TSOP"
V1 V2 V3 V4 V5 V6 V7 V8 V9 V10 V11 V12 V13 V14 V15 V16: "IC TRANSLATOR LEVEL 8CH 20-TSSOP"
ZIF: "CONN SOCKET PGA ZIF 169POS GOLD"

## Via types
v1: diameter 30, hole 15, Top Layer to Bottom Layer, 1025 vias

## Nets (pads, with @x,y where several pads share a name; then routed paths per layer and width w, separated by ;. In a path a pad name is that pad's centre, name@x,y a point inside that pad or via, vN(x,y) a via of type N, cw(c..) or ccw(c..) an arc to the next point about the centre after c; other vN are vias at no path point)
3V3: BH3.22 C1.VCC C2.VCC C3.VCC C4.VCC OB1.VCC OB2.VCC OB3.VCC OB4.VCC OB5.VCC OB6.VCC OB7.VCC OB8.VCC OB9.VCC OB10.VCC OB11.VCC OB12.VCC OB13.VCC OB14.VCC OB15.VCC OB16.VCC S1.VDD S2.VDD S3.VDD S4.VDD S5.VDD S6.VDD S7.VDD S8.VDD V1.VL V2.VL V3.VL V4.VL V5.VL V6.VL V7.VL V8.VL V9.VL V10.VL V11.VL V12.VL V13.VL V14.VL V15.VL V16.VL | length 32871.2
  Top Layer w7: S5.VDD@233.62,4840.75 v1@378.75,4840.75 ; V9.VL@359.57,4166.14 359.57,4195.64 ; v1(379,4841) v1@378.75,4840.75 ; v1(425,4204.07) 406.07,4223 386.93,4223 359.57,4195.64 ; v1(460.25,4896.75) 404.25,4840.75 v1@378.75,4840.75 ; v1(477,4279) 384,4279 359.57,4254.57 359.57,4195.64 ; v1(578.48,364.28) 614.25,328.5 614.25,277.25 ; S1.VDD@614.25,233.62 614.25,277.25 ; v1(614.25,936) 614.25,938.46 608,944.71 608,1029.25 614.25,1035.5 S2.VDD@614.25,1048.62 v1(614.25,1187) 614.25,1405.5 608,1411.75 608,1447.5 615.5,1455 631,1455 645.75,1469.75 S2.VDD@645.75,1501.38 645.75,1831.25 v1(647,1832.5) ; v1(629.75,595.76) 629.75,635.76 645.75,651.76 S1.VDD@645.75,686.38 ; v1(630,293) 614.25,277.25 ; S5.VDD@686.38,4809.25 737.75,4809.25 755,4792 v1(755,4760) ; v1(767.57,4271.02) v1@764,4271.02 ; v1(990,4817) 1013.75,4840.75 S6.VDD@1048.62,4840.75 ; v1(1159.57,4250) V11.VL@1159.57,4166.14 1159.57,4128 1180.57,4107 1348.31,4107 1380.31,4075 1489.96,4075 1529.53,4114.57 1581,4114.57 ; V1.VL@1308.86,359.57 1417,359.57 1443,385.57 1443,740.57 1424,759.57 1383.07,759.57 ; V2.VL@1308.86,759.57 1383.07,759.57 ; V3.VL@1308.86,1159.57 1357.64,1159.57 ; v1(1327,4841.25) 1359,4809.25 S6.VDD@1501.38,4809.25 1540.25,4809.25 1553.5,4822.5 1553.5,4866.75 v1(1560,4873.25) 1583.75,4849.5 1594.5,4849.5 1678.5,4765.5 1678.5,4156 1637.07,4114.57 1581,4114.57 ; v1(1374.07,1242.43) 1374.07,1176 1357.64,1159.57 ; v1(1413.74,1583.57) 1413.74,1564 1379.56,1562.56 ; v1(1426.5,1167) 1450.5,1143 1450.5,1117.07 ; v1(1462,1645) 1379.56,1562.56 ; V12.VL@1559.57,4166.14 1559.57,4136 1581,4114.57 ; v1(3901,1191) 3901,1202.54 3910.43,1211.98 V8.VL@3910.43,1308.86 ; v1(3907,661.75) 3923,645.75 S4.VDD@3973.62,645.75 ; v1(4087,3854) 4087,3869.28 4128.15,3910.43 V16.VL@4166.14,3910.43 ; v1(4103,4318) 4110.57,4310.43 V15.VL@4166.14,4310.43 ; v1(4103.58,4718.43) 4111.58,4710.43 V14.VL@4166.14,4710.43 ; v1(4112,5046) 4112,5094.43 4128,5110.43 V13.VL@4166.14,5110.43 ; v1(4283,1241) 4310.43,1268.43 V7.VL@4310.43,1308.86 ; v1(4352,673) 4352,641 4378.75,614.25 S4.VDD@4426.38,614.25 v1(4485,614.25) 4538.25,614.25 v1(4601.75,677.75) ; V6.VL@4710.43,1308.86 4710.43,1280 4698.23,1267.8 4675.38,1267.8 4661.99,1281.18 4661.99,1336.53 4662,1400 4681,1419 4954,1419 4996,1377 5024,1377 5046,1355 5046,1288 5069,1265 5096,1265 5110.43,1279.43 ; v1(4730,677.75) 4762,645.75 S3.VDD@4788.62,645.75 ; v1(4777.25,4720) 4809.25,4752 S7.VDD@4809.25,4788.62 ; S8.VDD@4809.25,3973.62 4809.25,4018.96 v1(4825.25,4034.96) 4825.25,4107.5 v1(4864.75,4147) ; v1(4824.75,4359.76) 4840.75,4375.76 S8.VDD@4840.75,4426.38 ; v1(4832.75,5164.18) 4840.75,5172.18 S7.VDD@4840.75,5241.38 ; v1(4926.84,614.25) 4943.59,631 5116.17,631 ; v1(5091,1231) 5110.43,1250.43 5110.43,1279.43 ; V5.VL@5110.43,1308.86 5110.43,1279.43 ; v1(5136,664) 5134.41,665.59 v1(5081.59,665.59) 5116.17,631 ; S3.VDD@5241.38,614.25 5212,614.25 5197.75,600 5147.17,600 5116.17,631 ; v1@764,4271.02 V10.VL@759.57,4166.14 759.57,4266.59 v1@764,4271.02 ; 1357.64,1159.57 1408,1159.57 1450.5,1117.07 ; 1379.56,1562.56 1376.57,1559.57 V4.VL@1308.86,1559.57 1379.56,1562.56 ; 1383.07,759.57 1450.5,827 1450.5,1117.07
  Mid-Layer 1 w7: v1(196,961) 197,960 590.25,960 v1(614.25,936) 718.33,936 v1(758,896.33) ; v1(379,4841) 416,4804 600.7,4804 605.2,4808.5 706.5,4808.5 v1(755,4760) ; v1(460.25,4896.75) 540,4817 v1(990,4817) 1063.5,4890.5 1277.75,4890.5 v1(1327,4841.25) ; v1(477,4279) 557,4199 750.57,4199 767.57,4216 v1(767.57,4271.02) 863.59,4175 1096.44,4186.87 v1(1159.57,4250) ; v1(614.25,1187) 664.75,1237.5 774.22,1237.5 842.22,1169.5 v1(855.38,1169.5) ; v1(1426.5,1167) 1450.5,1143 1450.5,968 1460.5,958 2634,958 2724,1048 3552,1048 3695,1191 v1(3901,1191) 4053.18,1191 4110.66,1248.48 4275.52,1248.48 v1(4283,1241) 4283,1272 4303,1292 v1(4603,1292) ; v1(3747,640) 3885.25,640 v1(3907,661.75) 3961.75,607 4094,607 4114.5,586.5 4265.5,586.5 v1(4352,673) ; v1(4824.75,4359.76) 4860.99,4396 5198.93,4396 v1(5320.93,4518)
  Mid-Layer 2 w7: v1(425,4204.07) 425,3129 529,3025 529,2005.5 v1(647,1887.5) ; v1(614.25,936) 630.5,919.75 630.5,596.51 v1(629.75,595.76) ; v1(1374.07,1242.43) 1342,1274.5 1342,1527 1398.57,1583.57 v1(1413.74,1583.57) ; v1(3747,640) 3738,649 3738,1052 3877,1191 v1(3901,1191) ; v1(4087,3854) 4133,3900 ; v1(4112,5046) 4132,5026 4132,4746.85 v1(4103.58,4718.43) 4134,4688.02 4134,4349 v1(4103,4318) 4133,4288 4133,3900 ; v1(4485,614.25) 4516.5,582.75 v1(4516.5,323.37) ; v1(4603,1292) 4603,2816.5 4133,3286.5 4133,3900 ; v1(4780,5072) 4780,4722.75 v1(4777.25,4720) 4824.75,4672.5 v1(4824.75,4359.76) 4856.75,4327.76 4856.75,4155 v1(4864.75,4147) ; v1@5075,672.17 v1(5081.59,665.59) ; v1(5091,1231) v1@5092.5,1229.5 ; v1@5134.36,673.64 v1(5136,664)
  Bottom Layer w7: v1(196,961) 199.93,957.07 C1.VCC@258.86,957.07 ; OB9.VCC@338.57,4691.14 338.57,4698.77 351.5,4711.7 351.5,4813.5 v1(379,4841) 379,5070 590.5,5281.5 911.5,5281.5 947.07,5245.93 C3.VCC@947.07,5161.14 ; v1(578.48,364.28) 578.48,544.48 v1(629.75,595.76) ; v1(630,293) 636,293 681,338 738.04,338 741.47,334.57 OB1.VCC@783.86,334.57 ; v1(647,1832.5) BH3.22@702,1887.5 ; v1(647,1887.5) 680,1887.5 ; OB10.VCC@735.57,4691.14 735.57,4740.57 v1(755,4760) ; v1(758,896.33) 799.33,855 896.42,855 950,801.42 950,728.29 937.71,716 877.21,716 858.65,734.57 OB2.VCC@783.86,734.57 ; OB3.VCC@783.86,1134.57 785.07,1134.57 810.57,1169.5 v1(855.38,1169.5) ; OB4.VCC@783.86,1534.57 730,1534.57 725.43,1530 465,1530 448,1547 448,1655.5 680,1887.5 ; v1(990,4817) 1044.57,4817 1133.57,4728 OB11.VCC@1133.57,4691.14 ; v1(1462,1645) 1185,1922 975,1922 940.5,1887.5 BH3.22@721.46,1887.5 BH3.22@702,1887.5 ; OB12.VCC@1532.57,4691.14 1532.57,4693 1570,4693 1610.5,4733.5 1610.5,4826.81 1564.05,4873.25 v1(1560,4873.25) ; v1(3907,661.75) 3885,683.75 3885,743 3925.86,783.86 OB8.VCC@3935.43,783.86 ; v1(4087,3854) 4672,3854 4692,3874 OB14.VCC@4692,3938.43 ; OB7.VCC@4335.43,783.86 4335.43,689.57 v1(4352,673) ; v1(4516.5,323.37) 4517.93,321.93 C2.VCC@4517.93,258.86 ; v1(4601.75,677.75) v1(4730,677.75) 4736.43,684.18 4736.43,728 ; v1(4603,1292) 5030,1292 v1(5091,1231) ; OB14.VCC@4691.14,3938.43 OB14.VCC@4692,3938.43 ; OB13.VCC@4691.14,4321.43 4727.57,4321.43 4734,4315 4779.99,4315 v1(4824.75,4359.76) ; OB16.VCC@4691.14,4737.43 4759.82,4737.43 v1(4777.25,4720) ; OB15.VCC@4691.14,5135.43 4732.57,5135.43 ; OB6.VCC@4736.43,783.86 4736.43,728 ; v1(4780,5072) 4780,5088 4732.57,5135.43 ; v1(4825.25,4034.96) 4728.72,3938.43 OB14.VCC@4692,3938.43 ; v1(4832.75,5164.18) 4804,5135.43 4732.57,5135.43 ; v1(4926.84,614.25) 4850.18,614.25 4736.43,728 ; v1(5081.59,665.59) 5066,681.17 5066,721.42 OB5.VCC@5128.43,783.86 ; v1@5128.43,671.57 v1(5136,664) ; C4.VCC@5216.14,4517.93 5320.87,4517.93 v1(5320.93,4518) ; 680,1887.5 BH3.22@702,1887.5
ADDRA_B0: C4.ADDR0 S7.ADDR0 S8.ADDR0 | length 2016.2
  Top Layer w7: v1(4596,4032) 4620.28,4007.72 S8.ADDR0@4620.28,3973.62 ; v1(4608.28,4909) 4620.28,4897 S7.ADDR0@4620.28,4788.62
  Mid-Layer 1 w7: v1(4608.28,4909) 4921,4909 v1(5101,4729)
  Mid-Layer 2 w7: v1(4596,4032) 4637,4073 4757.7,4073 4758.2,4072.5 4895.81,4072.5 5077.74,4254.43 5077.74,4581.26 5014.22,4644.78 5014.22,4668.94 5040,4694.72 5066.72,4694.72 v1(5101,4729)
  Bottom Layer w7: v1(5101,4729) 5144,4729 5175.93,4697.07 C4.ADDR0@5216.14,4697.07
ADDRA_B1: C4.ADDR1 S7.ADDR1 S8.ADDR1 | length 1769.4
  Top Layer w7: S8.ADDR1@4588.78,3973.62 4588.78,3935.78 4539,3886 4511,3886 4463,3934 4463,4095 4309,4249 4309,4379 4348,4418 4348,4591 4368,4611 4461.78,4611 v1(4580.78,4730) 4588.78,4738 S7.ADDR1@4588.78,4788.62
  Mid-Layer 1 w7: v1(4580.78,4730) 4616.28,4765.5 4879.5,4765.5 4921,4724 v1(4921,4691)
  Bottom Layer w7: v1(4921,4691) 4940.52,4671.48 C4.ADDR1@4983.86,4671.48
ADDRA_B2: C4.ADDR2 S7.ADDR2 S8.ADDR2 | length 2411
  Top Layer w7: v1(4533,4032) 4557.28,4007.72 S8.ADDR2@4557.28,3973.62 ; S7.ADDR2@4557.28,4788.62 4557.28,4851.28 v1(4559,4853)
  Mid-Layer 1 w7: v1(4559,4853) 4557,4851 4384.3,4851 4366,4832.7 4366,4706 4372,4700 4633.9,4700 4682.4,4748.5 4792.5,4748.5 v1(4863,4678)
  Mid-Layer 2 w7: v1(4533,4032) 4479,4086 4274,4086 4173,4187 4173,4494.96 4531.04,4853 v1(4559,4853)
  Bottom Layer w7: v1(4863,4678) 4895.11,4645.89 C4.ADDR2@4983.86,4645.89
ADDRA_B3: C4.ADDR3 S7.ADDR3 S8.ADDR3 | length 2227.5
  Top Layer w7: v1(4525.79,3915) S8.ADDR3@4525.79,3973.62 ; v1(4525.79,4730) S7.ADDR3@4525.79,4788.62
  Mid-Layer 1 w7: v1(4525.79,4730) 4578.79,4783 4928.02,4783 v1(5050.72,4660.3)
  Mid-Layer 2 w7: v1(4525.79,3915) 4596.51,3844.28 5075.28,3844.28 5095,3864 5095,4616.02 v1(5050.72,4660.3)
  Bottom Layer w7: C4.ADDR3@4983.86,4620.3 5024,4620.3 5050.72,4647.02 v1(5050.72,4660.3)
ADDRA_B4: C4.ADDR4 S7.ADDR4 S8.ADDR4 | length 2454.7
  Top Layer w7: S8.ADDR4@4494.29,3973.62 4494.29,4157.99 v1(4496,4159.69) ; S7.ADDR4@4494.29,4788.62 4494.29,4949.29 v1(4504,4959)
  Mid-Layer 2 w7: v1(4496,4159.69) 4524.69,4131 4782.45,4131 ; v1(4504,4959) 4627,4959 4640,4946 4640,4720.29 4796,4564.29 4796,4343.26 4816.99,4331.26 4829,4155 4805,4131 4782.45,4131 ; v1(5047,4561) 4979,4493 4979,4339 4936,4296 4936,4222 4964,4194 4964,4165 4914,4115 4797.95,4115 4782.45,4131
  Bottom Layer w7: C4.ADDR4@4983.86,4569.11 5038.89,4569.11 v1(5047,4561)
ADDRA_B5: C4.ADDR5 S7.ADDR5 S8.ADDR5 | length 2110.5
  Top Layer w7: S8.ADDR5@4494.29,4426.38 4494.29,4528.29 4511.43,4545.43 v1(4920.43,4545.43) ; v1(4494.29,5071.31) S7.ADDR5@4494.29,5241.38
  Mid-Layer 2 w7: v1(4494.29,5071.31) 4525.1,5040.5 4633.5,5040.5 4669.5,5076.5 4669.5,5226.5 4685,5242 4921,5233 4921,5099 4972,5048 4972,4597 v1(4920.43,4545.43)
  Bottom Layer w7: v1(4920.43,4545.43) 4922.33,4543.52 C4.ADDR5@4983.86,4543.52
ADDRA_B6: C4.ADDR6 S7.ADDR6 S8.ADDR6 | length 1958.2
  Top Layer w7: v1(4525.79,4367.76) S8.ADDR6@4525.79,4426.38 ; S7.ADDR6@4525.79,5241.38 4525.79,5182.21 v1(4540,5168)
  Mid-Layer 1 w7: v1(4525.79,4367.76) 4592.03,4434 4879,4434 4902,4457 4902,4515.93 4880,4537.93 4880,4562 v1(4913,4595)
  Mid-Layer 2 w7: v1(4540,5168) 4459.5,5087.5 4459.5,5047.31 4483.31,5023.5 4642.5,5023.5 4747,5128 4828,5128 4907,5049 4907,4807 4951,4763 4951,4633 v1(4913,4595)
  Bottom Layer w7: v1(4913,4595) 4913.3,4594.7 C4.ADDR6@4983.86,4594.7
ADDRA_B7: C4.ADDR7 S7.ADDR7 S8.ADDR7 | length 2139.6
  Top Layer w7: v1(4533.28,4485) 4557.28,4461 S8.ADDR7@4557.28,4426.38 ; S7.ADDR7@4557.28,5241.38 v1(4557.28,5332)
  Mid-Layer 1 w7: v1(4533.28,4485) 4542.28,4476 4724,4476 4879.5,4631.5 4934,4631.5 4962.5,4603 v1(5154,4603)
  Mid-Layer 2 w7: v1(4557.28,5332) 4604.38,5284.9 4962.6,5284.9 5154,5093.5 5154,5045 5188,5011 5188,4637 v1(5154,4603)
  Bottom Layer w7: v1(5154,4603) 5162.3,4594.7 C4.ADDR7@5216.14,4594.7
ADDRA_B8: C4.ADDR8 S7.ADDR8 S8.ADDR8 | length 1455.5
  Top Layer w7: v1(5029.72,4359.76) S8.ADDR8@5029.72,4426.38 ; S7.ADDR8@5029.72,5241.38 5029.72,5203.5 5069,5164.22 v1(5069,5087)
  Bottom Layer w7: v1(5029.72,4359.76) 5113.97,4444 5327.5,4444 5350,4466.5 5350,4600 5329.7,4620.3 5280.3,4620.3 ; v1(5069,5087) 5309,4847 5309,4649 5280.3,4620.3 ; C4.ADDR8@5216.14,4620.3 5280.3,4620.3
ADDRA_B9: C4.ADDR9 S7.ADDR9 S8.ADDR9 | length 1303.8
  Top Layer w7: v1(5049.22,4489) 5061.22,4477 S8.ADDR9@5061.22,4426.38 ; S7.ADDR9@5061.22,5241.38 5061.22,5288 v1(5077.22,5304)
  Mid-Layer 1 w7: v1(5049.22,4489) 5075.22,4515 5216.89,4515 v1(5279,4577.11)
  Mid-Layer 2 w7: v1(5077.22,5304) 5308,5073.22 5308,4606.11 v1(5279,4577.11)
  Bottom Layer w7: C4.ADDR9@5216.14,4569.11 5271,4569.11 v1(5279,4577.11)
ADDRA_B10: C4.ADDR10 S7.ADDR10 S8.ADDR10 | length 976.9
  Top Layer w7: S8.ADDR10@5092.72,4426.38 5092.72,4489 v1(5147.24,4543.52) ; S7.ADDR10@5092.72,5241.38 5092.72,5161.08 v1(5200,5053.79)
  Mid-Layer 2 w7: v1(5147.24,4543.52) 5205,4601.28 5205,5048.79 v1(5200,5053.79)
  Bottom Layer w7: v1(5147.24,4543.52) C4.ADDR10@5216.14,4543.52
ADDRA_B11: C4.ADDR11 S7.ADDR11 S8.ADDR11 | length 1138.7
  Top Layer w7: S8.ADDR11@5124.21,4426.38 5124.21,4469 v1(5140.21,4485) ; S7.ADDR11@5124.21,5241.38 5124.21,5184 5230,5078.21 5230,4488 v1(5215,4473)
  Bottom Layer w7: C4.ADDR11@4983.86,4517.93 5099.83,4517.93 v1@5136.49,4481.28 ; v1(5140.21,4485) v1@5136.49,4481.28 ; v1(5215,4473) 5144.76,4473 v1@5136.49,4481.28
ADDRB_B0: C3.ADDR0 S5.ADDR0 S6.ADDR0 | length 1686.1
  Top Layer w7: S5.ADDR0@686.38,4620.28 737,4620.28 v1(745,4612.28) ; S6.ADDR0@1501.38,4620.28 v1(1560,4620.28)
  Mid-Layer 1 w7: v1(745,4612.28) 909.28,4612.28 961.5,4664.5 1515.78,4664.5 v1(1560,4620.28)
  Mid-Layer 2 w7: v1(745,4612.28) 745,4690 784,4729 784,4976.5 774,4986.5 774,5039 752,5061 v1(752,5224)
  Bottom Layer w7: v1(752,5224) 767.93,5208.07 C3.ADDR0@767.93,5161.14
ADDRB_B1: C3.ADDR1 S5.ADDR1 S6.ADDR1 | length 1904.7
  Top Layer w7: v1(627.76,4612.78) 651.76,4588.78 S5.ADDR1@686.38,4588.78 ; v1(1443,4581) 1450.78,4588.78 S6.ADDR1@1501.38,4588.78
  Mid-Layer 1 w7: v1(627.76,4612.78) 807.54,4433 1056,4433 1115,4374 1259.59,4374 1379.45,4493.86 1379.45,4517.45 v1(1443,4581)
  Bottom Layer w7: v1(627.76,4612.78) 612.98,4598 540,4598 501,4637 501,4782 509.5,4790.5 509.5,4864 538.32,4892.82 602.82,4892.82 652.18,4843.45 758.45,4843.45 793.52,4878.52 C3.ADDR1@793.52,4928.86
ADDRB_B2: C3.ADDR2 S5.ADDR2 S6.ADDR2 | length 1719.8
  Top Layer w7: S5.ADDR2@686.38,4557.28 737,4557.28 v1(745,4549.28) ; S6.ADDR2@1501.38,4557.28 1536,4557.28 v1(1560,4533.28)
  Mid-Layer 1 w7: v1(745,4549.28) 843.78,4450.5 1295,4450.5 1317,4472.5 1317,4539.5 1372,4611 1482.28,4611 v1(1560,4533.28)
  Mid-Layer 2 w7: v1(745,4549.28) 774.78,4549.28 827,4601.5 827,4948.5 803,4972.5 v1(803,5000)
  Bottom Layer w7: v1(803,5000) 819.11,4983.89 C3.ADDR2@819.11,4928.86
ADDRB_B3: C3.ADDR3 S5.ADDR3 S6.ADDR3 | length 2292.8
  Top Layer w7: v1(627,4529) 627,4526 627.21,4525.79 S5.ADDR3@686.38,4525.79 ; v1(1238,4972) 1275,4935 1275,4789.5 1396,4668.5 1396,4566.79 v1(1437,4525.79) S6.ADDR3@1501.38,4525.79
  Mid-Layer 1 w7: v1(627,4529) 627,4454 715,4366 1004,4366 1076,4294 1254,4294 1308,4348 1440,4348 1460,4368 1460,4502.79 v1(1437,4525.79)
  Bottom Layer w7: C3.ADDR3@844.7,4928.86 844.7,4896 852.91,4887.8 965.2,4887.8 966,4887 1051,4972 v1(1238,4972)
ADDRB_B4: C3.ADDR4 S5.ADDR4 S6.ADDR4 | length 2274.5
  Top Layer w7: v1(574,4524) 603.71,4494.29 S5.ADDR4@686.38,4494.29 ; v1(1349,4532) 1386.71,4494.29 S6.ADDR4@1501.38,4494.29
  Mid-Layer 2 w7: v1(574,4524) 597,4547 597,4692 562,4727 562,4812 555,4819 555,4895 603,4943 640,4943 658,4961 658,4988 641,5005 606,5005 v1(575,5036)
  Bottom Layer w7: v1(574,4524) 598.08,4499.92 617.08,4499.92 619.5,4497.5 621.32,4497.5 623.74,4499.92 764.92,4499.92 800,4535 840.72,4535 860.7,4554.98 884.31,4554.98 895.81,4543.48 926.74,4543.48 938.26,4555 1028,4555 1068,4595 1160.07,4595 1171.07,4606 1275,4606 v1(1349,4532) ; v1(575,5036) 602.5,5063.5 640,5063.5 657.5,5046 888.89,5046 895.89,5039 C3.ADDR4@895.89,4928.86
ADDRB_B5: C3.ADDR5 S5.ADDR5 S6.ADDR5 | length 1983.7
  Top Layer w7: S5.ADDR5@233.62,4494.29 335.29,4494.29 v1(370,4529) ; S6.ADDR5@1048.62,4494.29 1182.4,4494.29 v1(1184.69,4492)
  Mid-Layer 1 w7: v1(370,4529) 512,4529 599.26,4616.26 599.26,4632 616.54,4649.28 635.72,4649.28 706,4579 771,4579 882,4468 1160.69,4468 v1(1184.69,4492)
  Mid-Layer 2 w7: v1(945,4992) 1042,4895 1153,4895 1175,4873 1175,4501.69 v1(1184.69,4492)
  Bottom Layer w7: C3.ADDR5@921.48,4928.86 921.48,4968.48 v1(945,4992)
ADDRB_B6: C3.ADDR6 S5.ADDR6 S6.ADDR6 | length 2050.4
  Top Layer w7: v1(175,4526) 175.21,4525.79 S5.ADDR6@233.62,4525.79 ; v1(990,4525.79) S6.ADDR6@1048.62,4525.79
  Mid-Layer 1 w7: v1(175,4526) 42,4659 42,4816.5 61,4835.5 306.5,4835.5 397,4926 504,4926 519,4911 580,4911 619,4872 654,4872 718,4936 793,4936 v1(867,5010)
  Mid-Layer 2 w7: v1(867,5010) 875,5002 875,4824 1014,4685 1014,4549.79 v1(990,4525.79)
  Bottom Layer w7: v1(867,5010) 870.3,5006.7 C3.ADDR6@870.3,4928.86
ADDRB_B7: C3.ADDR7 S5.ADDR7 S6.ADDR7 | length 2174.9
  Top Layer w7: S5.ADDR7@233.62,4557.28 236.41,4554.5 318.81,4554.5 448,4683.7 448,4846.5 464.5,4863 480.5,4863 490,4872.5 490,5178 565,5253 v1(862,5253) ; S6.ADDR7@1048.62,4557.28 v1(1107.24,4557.28)
  Mid-Layer 2 w7: v1(911.5,5233.7) 897,5219.2 897,4987 1107.24,4776.76 v1(1107.24,4557.28)
  Bottom Layer w7: v1(862,5253) 870.3,5244.7 870.3,5192.5 ; C3.ADDR7@870.3,5161.14 870.3,5192.5 ; v1(911.5,5233.7) 870.3,5192.5
ADDRB_B8: C3.ADDR8 S5.ADDR8 S6.ADDR8 | length 968.2
  Top Layer w7: S5.ADDR8@233.62,5029.72 v1(431,5029.72) ; v1(990,5037.72) 998,5029.72 S6.ADDR8@1048.62,5029.72
  Bottom Layer w7: v1(431,5029.72) 482.28,5081 672,5081 686,5067 829,5067 844.7,5082.7 844.7,5123.58 ; C3.ADDR8@844.7,5161.14 844.7,5123.58 ; v1(990,5037.72) 983.22,5044.5 916.22,5044.5 844.7,5123.58
ADDRB_B9: C3.ADDR9 S5.ADDR9 S6.ADDR9 | length 1052.3
  Top Layer w7: S5.ADDR9@233.62,5061.22 316.22,5061.22 v1(324,5069) ; v1(926.81,5082.22) 935.04,5074 1010.72,5074 1023.5,5061.22 S6.ADDR9@1048.62,5061.22
  Mid-Layer 1 w7: v1(324,5069) 640,5069 657.61,5051.39 657.61,5038.39 742.27,4953.73 752,4953.73 774.5,4976.23 774.5,5019 784.5,5029 820,5029 873.22,5082.22 v1(926.81,5082.22)
  Bottom Layer w7: C3.ADDR9@895.89,5161.14 895.89,5113.15 v1(926.81,5082.22)
ADDRB_B10: C3.ADDR10 S5.ADDR10 S6.ADDR10 | length 1087.8
  Top Layer w7: v1(175,5093) 175.28,5092.72 S5.ADDR10@233.62,5092.72 ; v1(990,5108.72) 1006,5092.72 S6.ADDR10@1048.62,5092.72
  Mid-Layer 1 w7: v1(175,5093) 204,5122 678,5122 707,5151 947.72,5151 v1(990,5108.72)
  Bottom Layer w7: C3.ADDR10@921.48,5161.14 921.48,5132 944.76,5108.72 v1(990,5108.72)
ADDRB_B11: C3.ADDR11 S5.ADDR11 S6.ADDR11 | length 1231.9
  Top Layer w7: S5.ADDR11@233.62,5124.21 338.58,5124.21 v1(384.36,5170) ; S6.ADDR11@1048.62,5124.21 v1(1107.24,5124.21)
  Mid-Layer 1 w7: v1(384.36,5170) 1061.46,5170 v1(1107.24,5124.21)
  Bottom Layer w7: C3.ADDR11@947.07,4928.86 947.07,4948 1107.24,5108.18 v1(1107.24,5124.21)
ADDRC_B0: C2.ADDR0 S3.ADDR0 S4.ADDR0 | length 2184.4
  Top Layer w7: S4.ADDR0@3973.62,834.72 4027.28,834.72 4048.28,813.72 4126.84,813.72 v1(4164.12,851) ; v1(4726,318) 4691,353 4691,472 4626,537 4626,583.35 4666.5,623.85 4666.5,627.73 4670.22,631.44 4670.22,843.64 4702.08,875.5 4737,875.5 4751.5,861 4751.5,847 4763.78,834.72 S3.ADDR0@4788.62,834.72 4816,834.72 4829.72,821 4943.5,821 4964,841.5 4964,904 v1(4933,935)
  Mid-Layer 1 w7: v1(4164.12,851) 4260.7,851 4281.2,871.5 4304.81,871.5 4330.59,845.72 4547.72,845.72 4680,978 4890,978 v1(4933,935)
  Bottom Layer w7: C2.ADDR0@4697.07,258.86 4697.07,289.07 v1(4726,318)
ADDRC_B1: C2.ADDR1 S3.ADDR1 S4.ADDR1 | length 1636.1
  Top Layer w7: S4.ADDR1@3973.62,866.22 4039.78,866.22 4050,856 4051,857 4054,854 v1(4061,854) ; S3.ADDR1@4788.62,866.22 4839.24,866.22 v1(4847.24,858.22)
  Mid-Layer 1 w7: v1(4061,854) 4065,854 4067,856 4125.5,797.5 4561.5,797.5 4573,786 4573,709.76 4516,652.76 4516,536.5 4527.5,525 4626.48,525 v1(4655.48,554)
  Mid-Layer 2 w7: v1(4655.48,554) 4752,554 4799,601 4799,809.98 v1(4847.24,858.22)
  Bottom Layer w7: v1(4655.48,554) 4671.48,538 C2.ADDR1@4671.48,491.14
ADDRC_B2: C2.ADDR2 S3.ADDR2 S4.ADDR2 | length 2463.7
  Top Layer w7: S4.ADDR2@3973.62,897.72 4003.74,897.72 4017.46,884 4122,884 4206,968 4206,1358 4294,1446 4528,1446 4548,1426 4548,1288 4576,1260 4600,1260 4683,1177 4683,918.72 4700.22,901.5 4742.22,901.5 ; v1(4722,921.72) 4742.22,901.5 ; S3.ADDR2@4788.62,897.72 4746,897.72 4742.22,901.5
  Mid-Layer 2 w7: v1(4662,429) 4626.98,464.02 4626.98,660.98 4673,707 4721,707 4742,728 4742,774.69 4714.47,802.22 4704.7,802.22 4688,818.91 4688,842.52 4693.5,848.02 4693.5,893.22 v1(4722,921.72)
  Bottom Layer w7: C2.ADDR2@4645.89,491.14 4645.89,445.11 v1(4662,429)
ADDRC_B3: C2.ADDR3 S3.ADDR3 S4.ADDR3 | length 2479.4
  Top Layer w7: S4.ADDR3@3973.62,929.21 4016.24,929.21 v1(4032.24,913.21) ; S3.ADDR3@4788.62,929.21 4839.21,929.21 4847.42,921 v1(4861,921)
  Mid-Layer 1 w7: v1(4032.24,913.21) 4056.24,913.21 4154.96,814.5 4640.5,814.5 4702,876 4786,876 4831,921 v1(4861,921)
  Bottom Layer w7: v1(4032.24,913.21) 4008.24,913.21 3851,755.97 3851,469 3872,448 4311,448 4447,584 4559,584 4620.3,522.7 C2.ADDR3@4620.3,491.14
ADDRC_B4: C2.ADDR4 S3.ADDR4 S4.ADDR4 | length 2034.2
  Top Layer w7: S4.ADDR4@3973.62,960.71 4068.29,960.71 v1(4104,925) ; S3.ADDR4@4788.62,960.71 4822.24,960.71 4845.54,984 4949,984 v1(4967,1002)
  Mid-Layer 1 w7: v1(4104,925) 4104,977 4143,1016 4953,1016 v1(4967,1002) 4967,872 4743,648 4639,648 v1(4545,554)
  Bottom Layer w7: v1(4545,554) 4569.11,529.89 C2.ADDR4@4569.11,491.14
ADDRC_B5: C2.ADDR5 S3.ADDR5 S4.ADDR5 | length 2867.4
  Top Layer w7: v1(4274,1066) 4379.29,960.71 S4.ADDR5@4426.38,960.71 4456.5,960.71 4493,997.21 4493,1150 4515,1172 4643.13,1172 4656,1159.13 4656,1097 4650,1091 4650,635.27 4649.5,634.77 4649.5,631.52 4609,591.02 4609,499 4568,458 v1(4568,394) ; v1(5064,1018) 5147,1018 5204.29,960.71 S3.ADDR5@5241.38,960.71
  Mid-Layer 1 w7: v1(4274,1066) 4290,1050 4800,1050 4821,1071 4821,1128 4845,1152 5150,1152 5165,1137 5165,1103.43 5079.57,1018 v1(5064,1018)
  Bottom Layer w7: C2.ADDR5@4543.52,491.14 4543.52,418.48 v1(4568,394)
ADDRC_B6: C2.ADDR6 S3.ADDR6 S4.ADDR6 | length 2019.6
  Top Layer w7: S4.ADDR6@4426.38,929.21 4477,929.21 v1(4485,937.21) ; S3.ADDR6@5241.38,929.21 v1(5315.98,929.21)
  Mid-Layer 2 w7: v1(4485,937.21) 4460,912.21 4460,680.26 4609.98,530.28 4609.98,430.02 v1(4611,429)
  Bottom Layer w7: C2.ADDR6@4594.7,491.14 4594.7,445.3 v1(4611,429) 4652,388 4808,388 4908,488 5015,488 5039,512 5332,512 5356,536 5356,815.19 5315.98,855.22 v1(5315.98,929.21)
ADDRC_B7: C2.ADDR7 S3.ADDR7 S4.ADDR7 | length 2868.4
  Top Layer w7: S4.ADDR7@4426.38,897.72 4456.5,897.72 4466.78,908 4503.29,908 4514,918.71 4514,1090 4578.51,1154.51 4626.62,1154.51 4638,1143.13 4638,1108 4632,1102 4632,660.94 4590.27,619.21 4590.27,521.27 4538,469 4538,376.04 4556.04,358 4576,358 4599,335 4599,216 v1(4579,196) ; v1(5182,940) 5182,930.47 5214.76,897.72 S3.ADDR7@5241.38,897.72
  Mid-Layer 1 w7: v1(4579,196) 4633,250 4793,250 4967,424 5196,424 5228,456 5228,601 5212,617 5212,900.47 5182,930.47 v1(5182,940)
  Bottom Layer w7: v1(4579,196) 4594.7,211.7 C2.ADDR7@4594.7,258.86
ADDRC_B8: C2.ADDR8 S3.ADDR8 S4.ADDR8 | length 1082
  Top Layer w7: S4.ADDR8@4426.38,425.28 v1(4485,425.28) ; S3.ADDR8@5241.38,425.28 v1(5300,425.28)
  Bottom Layer w7: v1(4485,425.28) 4556.28,354 4594.3,354 4620.3,328 ; C2.ADDR8@4620.3,258.86 4620.3,328 ; v1(5300,425.28) 4951.28,425.28 4876.3,350.3 4642.59,350.3 4620.3,328
ADDRC_B9: C2.ADDR9 S3.ADDR9 S4.ADDR9 | length 1173.8
  Top Layer w7: S4.ADDR9@4426.38,393.78 4496.22,393.78 4568,322 v1(4569.11,322) ; v1(5182,394) 5182.22,393.78 S3.ADDR9@5241.38,393.78
  Mid-Layer 1 w7: v1(4569.11,322) 4550,302.89 4550,184.5 4567.5,167 4599,167 4636,204 4992,204 v1(5182,394)
  Bottom Layer w7: C2.ADDR9@4569.11,258.86 v1(4569.11,322)
ADDRC_B10: C2.ADDR10 S3.ADDR10 S4.ADDR10 | length 1390.6
  Top Layer w7: S4.ADDR10@4426.38,362.28 v1(4485,362.28) ; S3.ADDR10@5241.38,362.28 v1(5300,362.28)
  Mid-Layer 2 w7: v1(4485,162) v1(4485,362.28)
  Bottom Layer w7: v1(4485,162) 4543.52,220.52 ; C2.ADDR10@4543.52,258.86 4543.52,220.52 ; v1(5300,362.28) 5054.72,117 4560,117 4543.52,133.48 4543.52,220.52
ADDRC_B11: C2.ADDR11 S3.ADDR11 S4.ADDR11 | length 1377.5
  Top Layer w7: v1(4367.76,330.79) S4.ADDR11@4426.38,330.79 ; v1(5077.21,218) 5190,330.79 S3.ADDR11@5241.38,330.79
  Mid-Layer 1 w7: v1(4367.76,330.79) 4588.54,110 4969.21,110 v1(5077.21,218)
  Bottom Layer w7: v1(4367.76,330.79) 4367.76,390.76 4450,473 4517.93,473 C2.ADDR11@4517.93,491.14
ADDRD_B0: C1.ADDR0 S1.ADDR0 S2.ADDR0 | length 2086.7
  Top Layer w7: S2.ADDR0@834.72,1501.38 834.72,1351 920.72,1265 1014,1265 1039,1240 1039,1002 1081,960 1081,851.5 1064,834.5 875.98,834.5 869.5,828.02 869.5,752.5 834.72,717.72 S1.ADDR0@834.72,686.38 834.72,570.28 v1(870,535)
  Mid-Layer 1 w7: v1(322,770) 380,770 485,665 485,617 526,576 570,566 686,566 717,535 v1(870,535)
  Bottom Layer w7: C1.ADDR0@258.86,777.93 314.07,777.93 v1(322,770)
ADDRD_B1: C1.ADDR1 S1.ADDR1 S2.ADDR1 | length 1779
  Top Layer w7: S1.ADDR1@866.22,686.38 866.22,720.22 890,744 v1@890,797 ; S2.ADDR1@866.22,1501.38 866.22,1564.22 v1(870,1568) ; v1(898,805) v1@890,797 ; v1(1010.5,805) 898.49,797.56 v1@890,797
  Mid-Layer 2 w7: v1(696,853) 712,837 866,837 v1(898,805) ; v1(870,1568) 1073,1365 1097.44,1365 1167,1295.44 1167,925 1047,805 v1(1010.5,805)
  Bottom Layer w7: C1.ADDR1@491.14,803.52 535.21,803.52 564.73,774 617,774 v1(696,853)
ADDRD_B2: C1.ADDR2 S1.ADDR2 S2.ADDR2 | length 1663.3
  Top Layer w7: v1(880,1443) 897.72,1460.72 S2.ADDR2@897.72,1501.38 ; v1(889.43,628) 897.72,636.28 S1.ADDR2@897.72,686.38
  Mid-Layer 1 w7: v1(578,805) 583.5,799.5 717.93,799.5 724.5,792.93 724.5,788.2 884.7,628 v1(889.43,628)
  Mid-Layer 2 w7: v1(578,805) 449,934 449,1168.69 445,1172.69 445,1263 608,1426 608,1447.5 623,1462.5 860.5,1462.5 v1(880,1443)
  Bottom Layer w7: C1.ADDR2@491.14,829.11 553.89,829.11 v1(578,805)
ADDRD_B3: C1.ADDR3 S1.ADDR3 S2.ADDR3 | length 1980.7
  Top Layer w7: v1(921.21,745) 929.21,737 S1.ADDR3@929.21,686.38 ; S2.ADDR3@929.21,1501.38 v1(929.21,1560)
  Mid-Layer 2 w7: v1(921.21,745) 970.21,696 1127,696 1173,742 1222,742 1276,796 1276,1252 968,1560 v1(929.21,1560)
  Bottom Layer w7: C1.ADDR3@491.14,854.7 642.7,854.7 670,882 722,882 768,836 840,836 852.5,823.5 852.5,797.71 905.21,745 v1(921.21,745)
ADDRD_B4: C1.ADDR4 S1.ADDR4 S2.ADDR4 | length 2467.6
  Top Layer w7: S2.ADDR4@960.71,1501.38 960.71,1389.29 1064,1286 1064,1075 1118,1021 1118,982 1101,965 1101,842.04 970.96,712 S1.ADDR4@960.71,686.38 960.71,586.61 978,569.31 v1(978,469.89)
  Mid-Layer 1 w7: v1(413,901.8) 326.2,901.8 291,866.61 291,535.52 404,422.52 684,422.52 724.48,463 971.11,463 v1(978,469.89)
  Bottom Layer w7: v1(413,901.8) 417.08,905.89 C1.ADDR4@491.14,905.89
ADDRD_B5: C1.ADDR5 S1.ADDR5 S2.ADDR5 | length 2534.9
  Top Layer w7: v1(733,90) 861,90 960.71,189.71 S1.ADDR5@960.71,233.62 ; v1(926,1214) 960.71,1179.29 S2.ADDR5@960.71,1048.62
  Mid-Layer 2 w7: v1(733,90) 746,103 746,326.46 594.5,477.96 594.5,532.5 629,567 649.25,567 659,576.75 659,663.5 648,674.5 648,959.62 642.62,965 600.5,965 588.15,952.65 ; v1(926,1214) 759.5,1380.5 638.5,1380.5 625,1367 625,1283 644,1264 644,1126 588.15,1070.15 588.15,952.65 ; 588.15,952.65 588.15,949.15 v1(554,915) 554,918.5 588.15,952.65
  Bottom Layer w7: C1.ADDR5@491.14,931.48 537.52,931.48 v1(554,915)
ADDRD_B6: C1.ADDR6 S1.ADDR6 S2.ADDR6 | length 2369.2
  Top Layer w7: v1(661,359) 714,412 801.5,412 809.5,404 851.39,404 929.21,326.18 S1.ADDR6@929.21,233.62 ; S2.ADDR6@929.21,1048.62 v1(929.21,1107.24)
  Mid-Layer 2 w7: v1(661,359) 577,443 577,549 595,567 595,772.5 613.5,791 613.5,867.5 v1(596,885) 526,885 523,888 523,1068 543,1088 543,1297.56 559.62,1314.18 559.62,1337.32 619.81,1397.5 649.81,1397.5 655.31,1403 791.03,1403 992,1202.03 992,1170.03 v1(929.21,1107.24)
  Bottom Layer w7: C1.ADDR6@491.14,880.3 591.3,880.3 v1(596,885)
ADDRD_B7: C1.ADDR7 S1.ADDR7 S2.ADDR7 | length 2445.2
  Top Layer w7: v1(873.72,990) 897.72,1014 S2.ADDR7@897.72,1048.62 ; S1.ADDR7@897.72,233.62 897.72,175.28 v1(898,175)
  Mid-Layer 1 w7: v1(356,864) 369,851 621,851 652,882 724,882 752.5,853.5 791,853.5 833,895.5 833,949.28 v1(873.72,990)
  Mid-Layer 2 w7: v1(356,864) 298.08,864 280.59,846.52 280.59,261.41 300,242 629.5,242 655,216.5 655,77 689,43 879,43 898,62 v1(898,175)
  Bottom Layer w7: C1.ADDR7@258.86,880.3 339.7,880.3 v1(356,864)
ADDRD_B8: C1.ADDR8 S1.ADDR8 S2.ADDR8 | length 1201.3
  Top Layer w7: v1(196.3,871.3) 225,842.59 225,569.28 425.28,369 S1.ADDR8@425.28,233.62 ; v1(401.28,1107.24) 425.28,1083.24 S2.ADDR8@425.28,1048.62
  Mid-Layer 2 w7: v1(196.3,871.3) 196.3,919.21 384.33,1107.24 v1(401.28,1107.24)
  Bottom Layer w7: v1(196.3,871.3) 212.89,854.7 C1.ADDR8@258.86,854.7
ADDRD_B9: C1.ADDR9 S1.ADDR9 S2.ADDR9 | length 1477.7
  Top Layer w7: S1.ADDR9@393.78,233.62 393.78,175.22 v1(394,175) ; v1(393.78,990) S2.ADDR9@393.78,1048.62
  Mid-Layer 2 w7: v1(393.78,990) 361,957.22 361,920 335.98,894.98 304.05,894.98 253,843.93 253,232 310,175 v1(394,175)
  Bottom Layer w7: C1.ADDR9@258.86,905.89 287.11,905.89 292,901 339.5,901 351,912.5 351,951.5 341.5,961 311.48,961 294.29,978.2 294.29,1008.51 315.53,1029.75 354.03,1029.75 v1(393.78,990)
ADDRD_B10: C1.ADDR10 S1.ADDR10 S2.ADDR10 | length 951.3
  Top Layer w7: v1(322,931.48) 362.28,971.76 S2.ADDR10@362.28,1048.62 ; S1.ADDR10@362.28,233.62 v1(362.28,297.72)
  Mid-Layer 1 w7: v1(322,931.48) 274,883.48 274,386 v1(362.28,297.72)
  Bottom Layer w7: C1.ADDR10@258.86,931.48 v1(322,931.48)